# EAGLE board Logic_Level_Bidirectional-GiantPanel-v01 (EAGLE 6.5.0), part 1 of 13
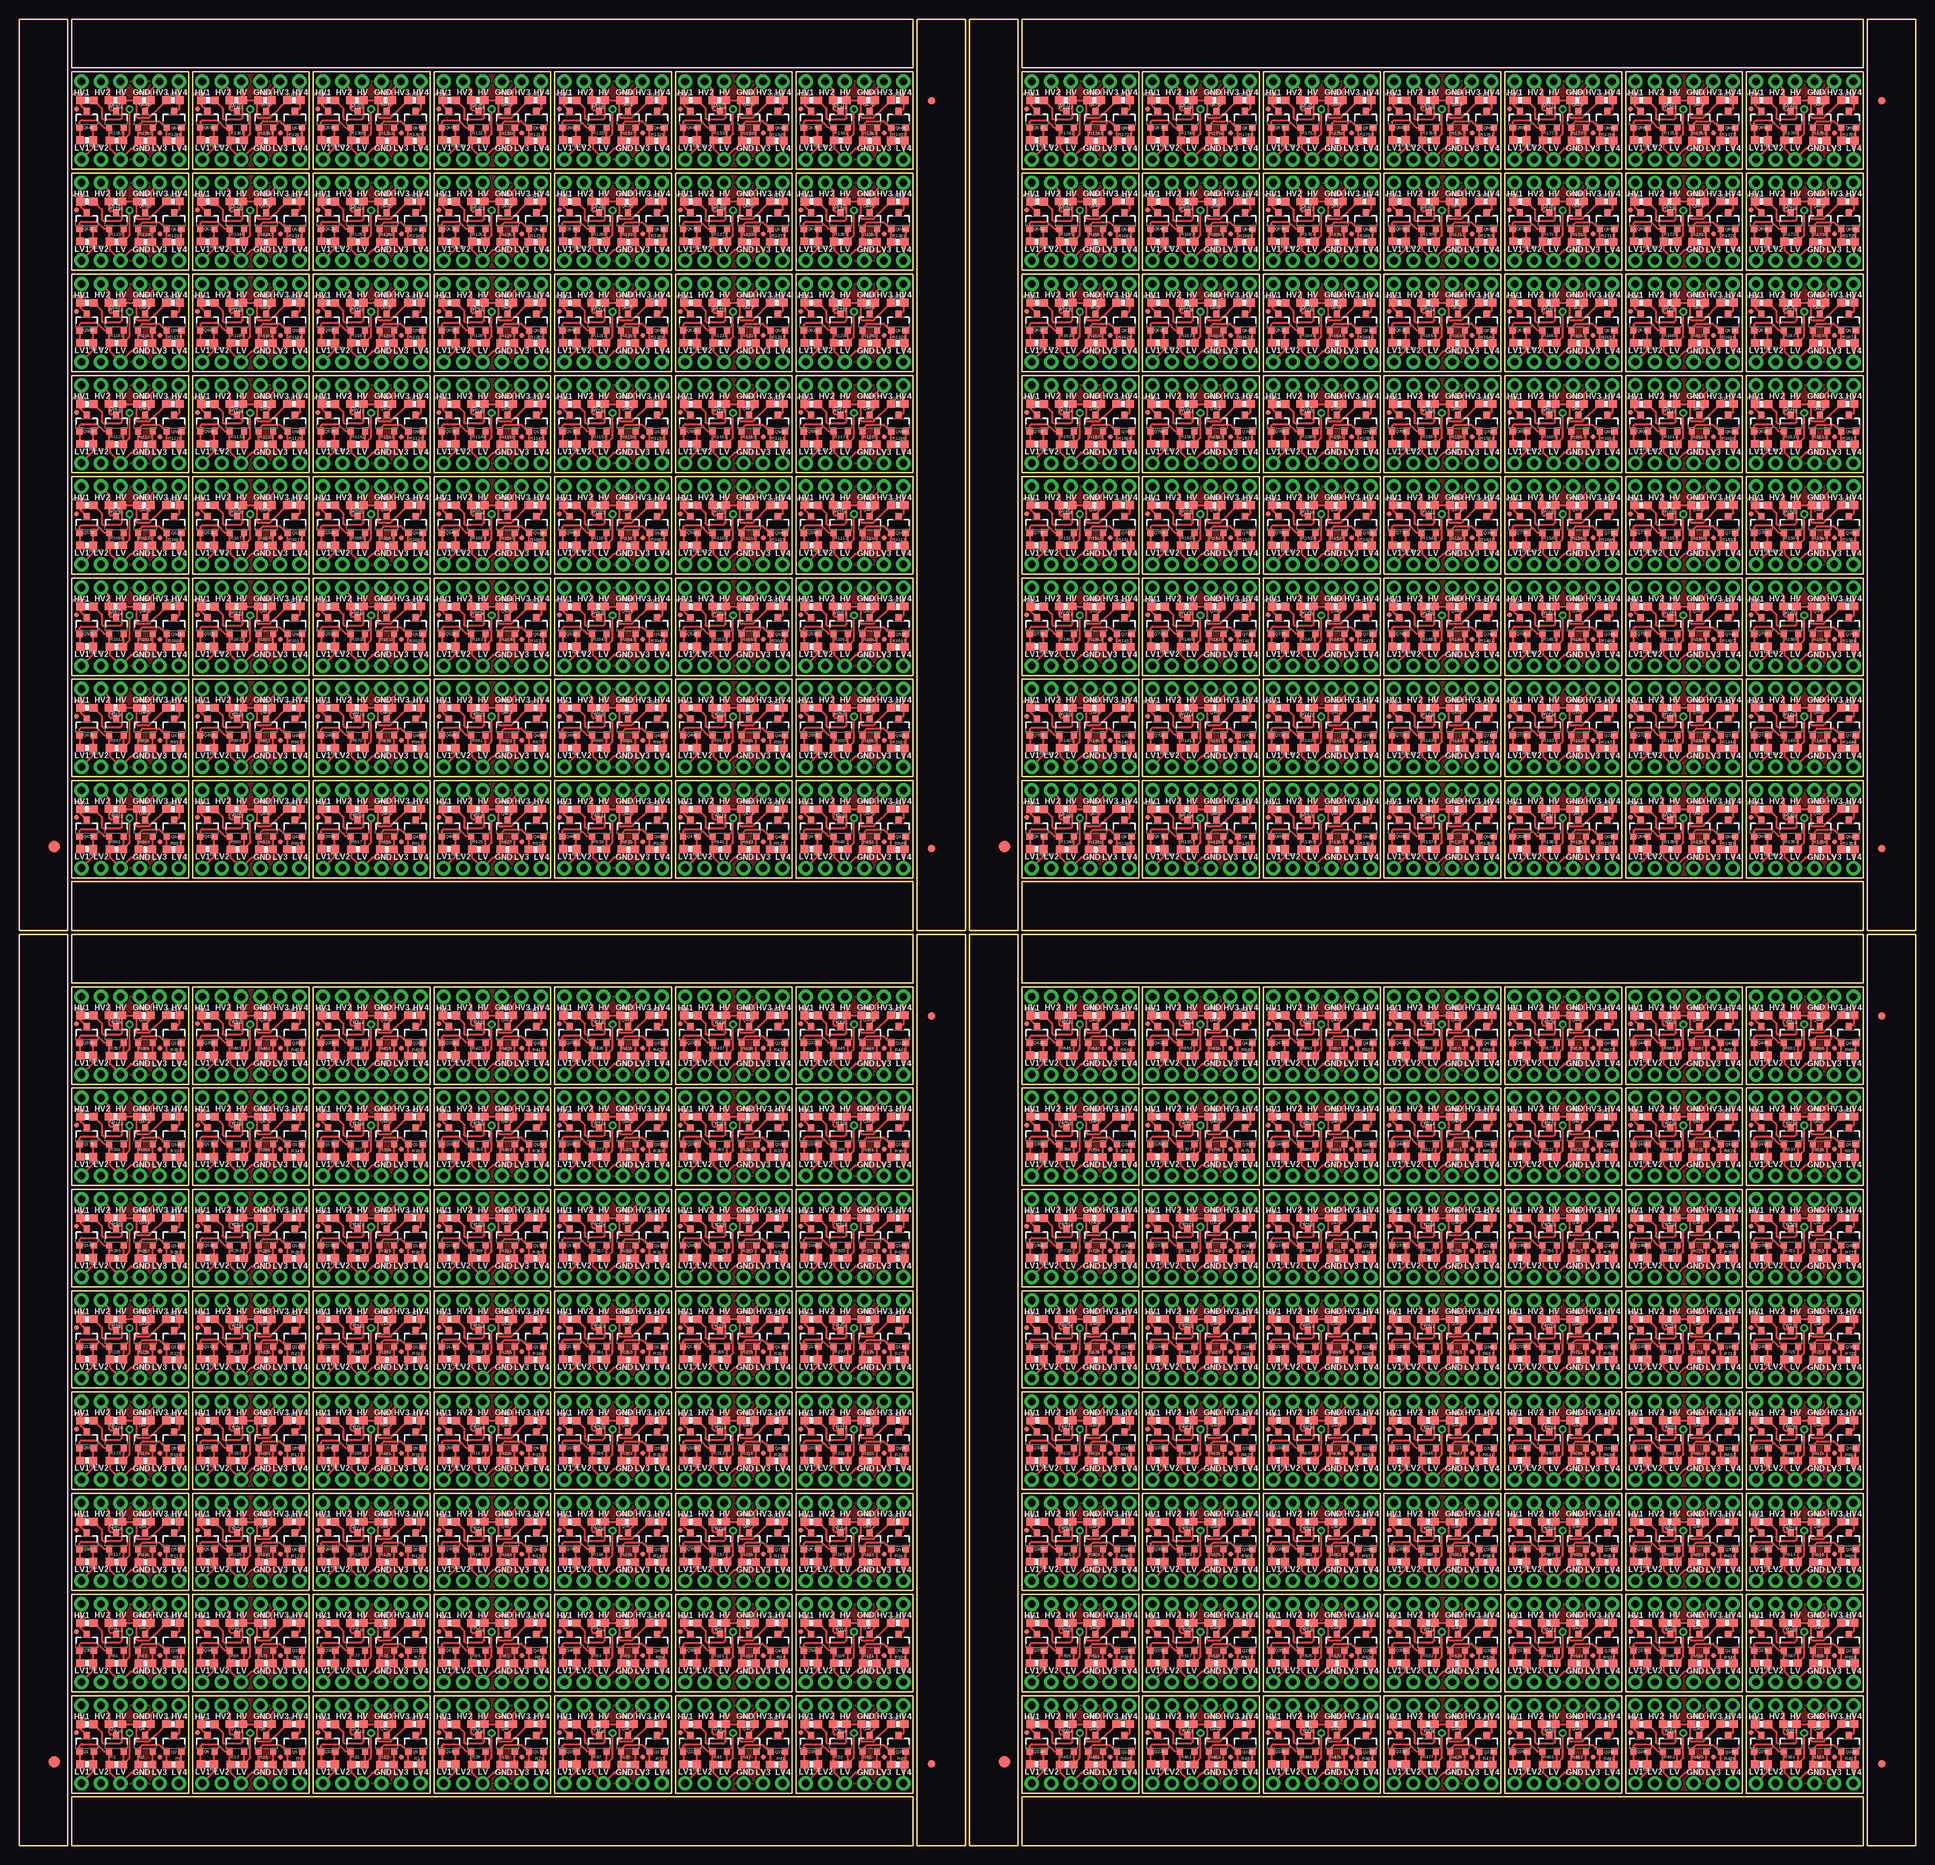
[diagram p0: board, top side]
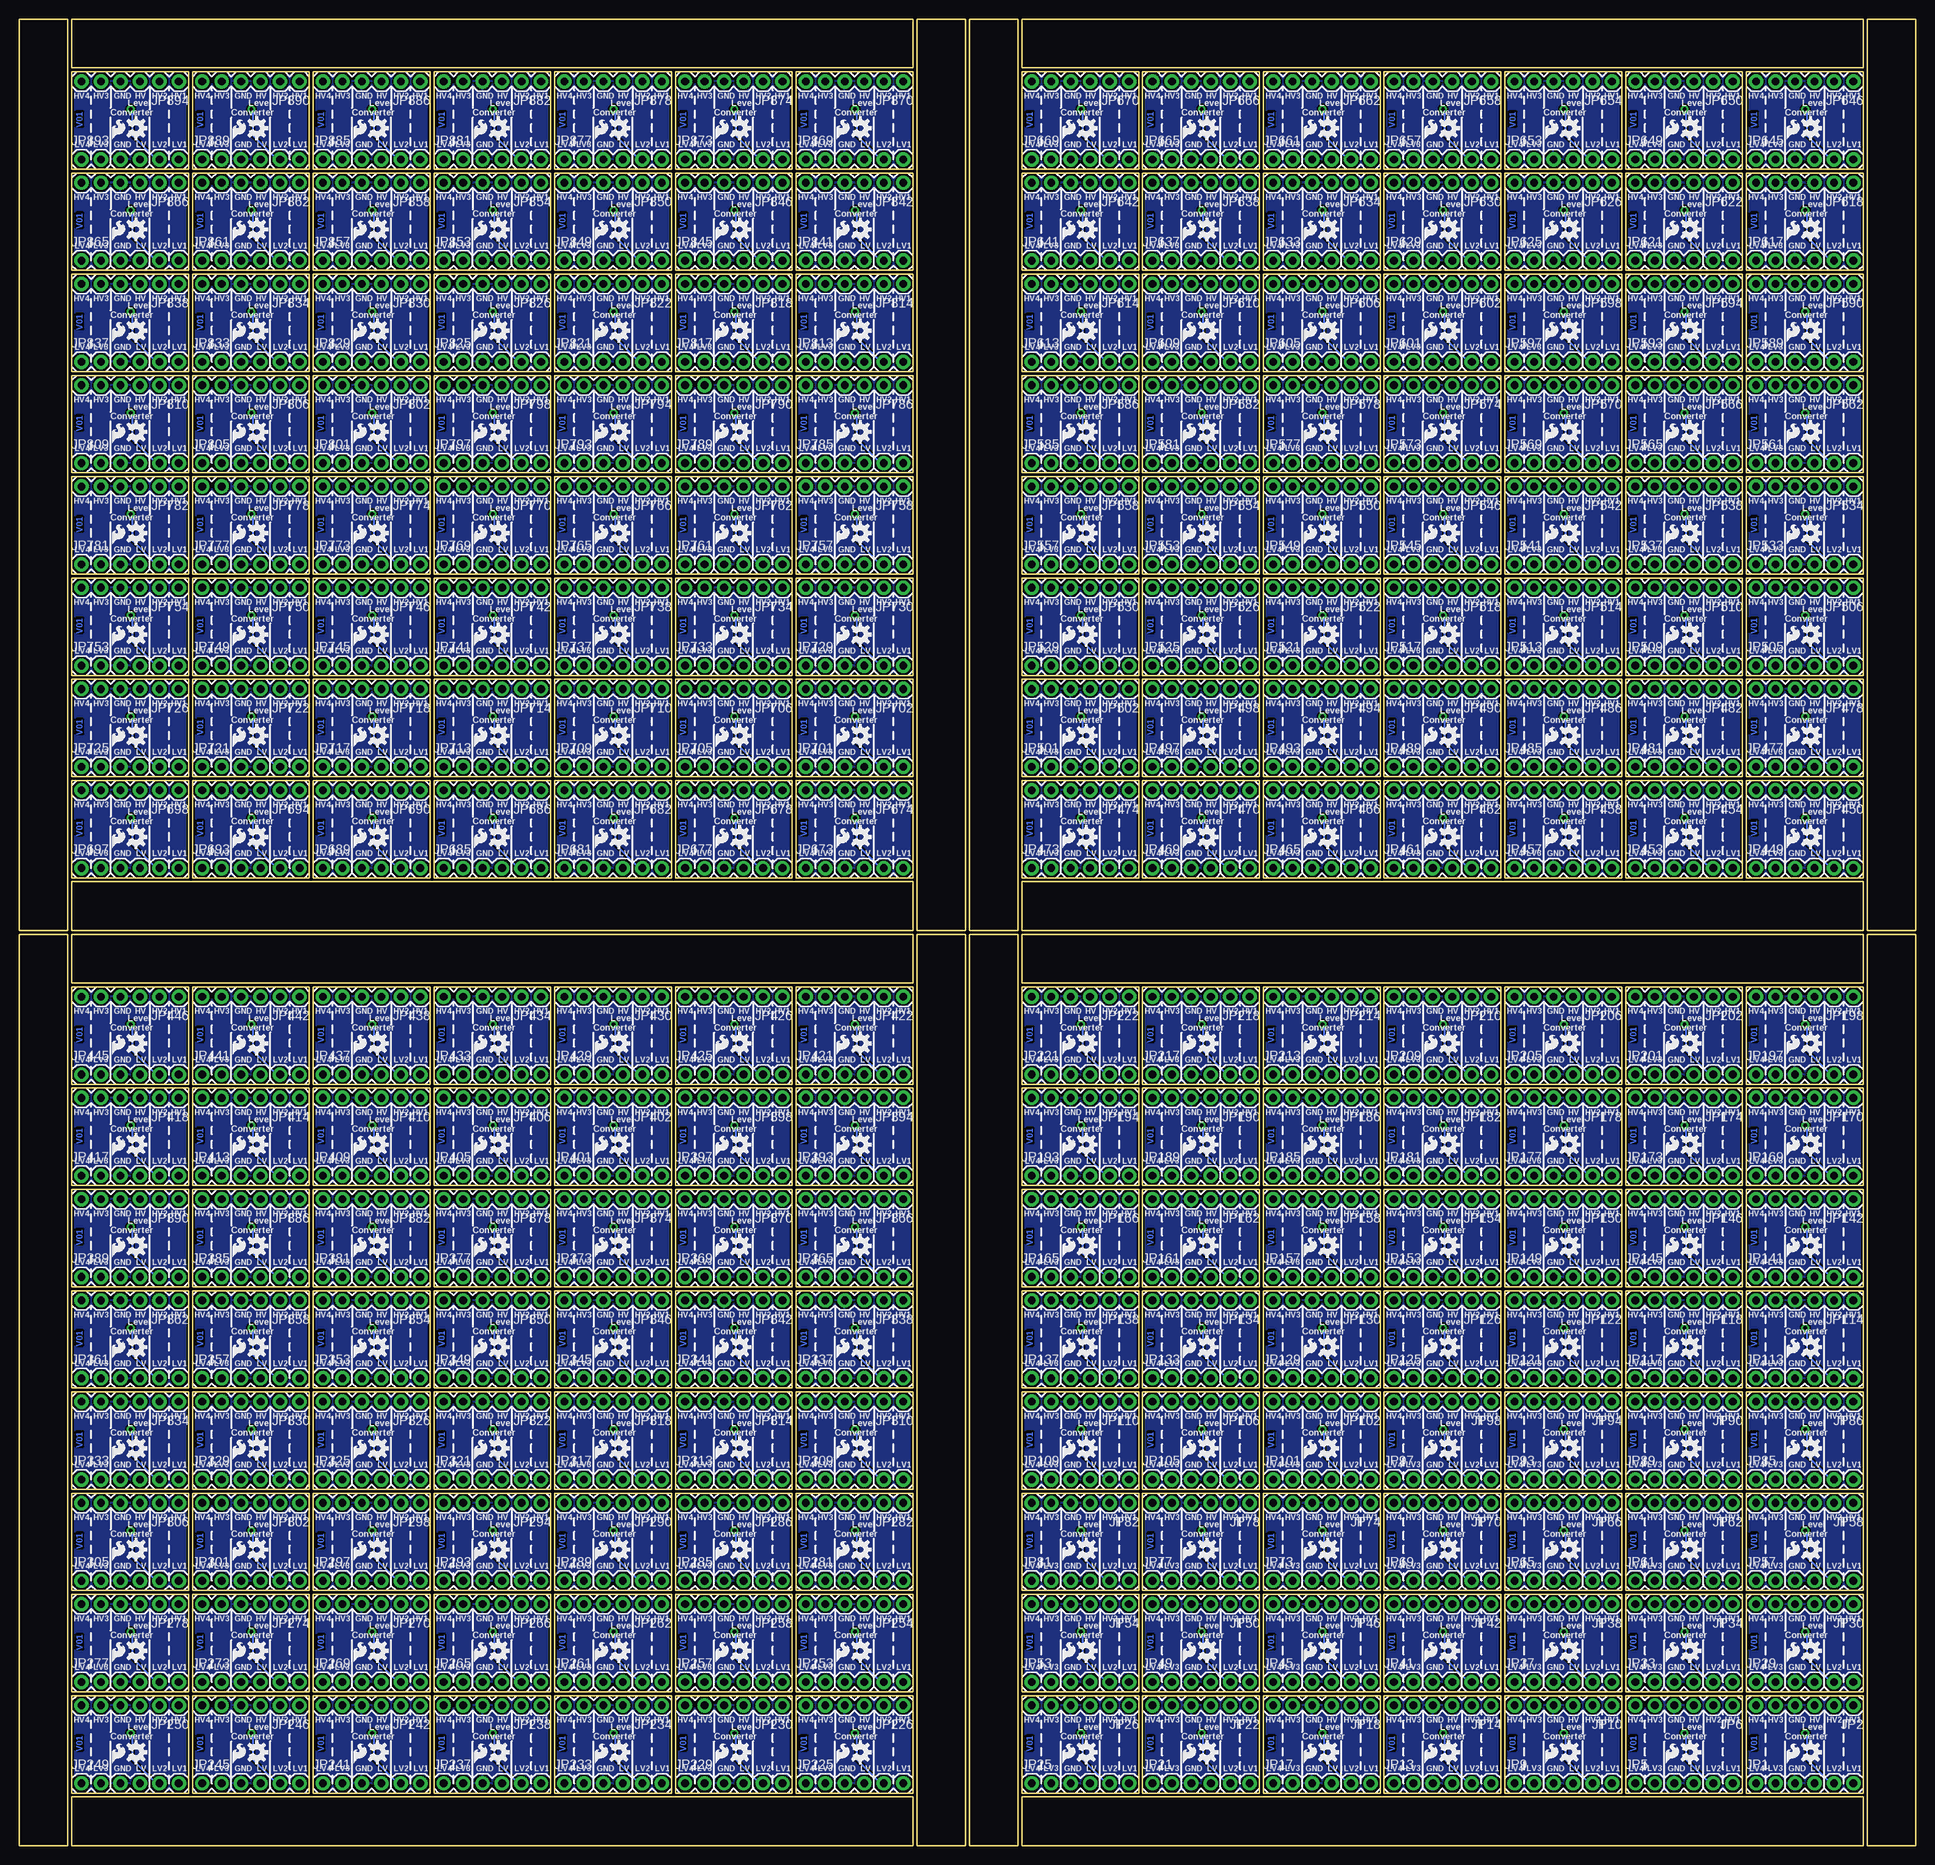
[diagram p1: board, bottom side, seen from below]

Size 247.4 x 238.25 mm. Coordinates in mm from the lower left corner, seen from the top.
Outline: 960 segments
Copper layers (1*16): Top 0.035mm / dielectric 1.5mm / Bottom 0.035mm
Design rules "SparkFun *": minimum track width 7mil, minimum drill 15mil, track to track 8mil, track to pad 8mil, pad to pad 8mil, via to via 8mil, smd to smd 8mil, copper to edge 8mil, drill to drill 8mil, minimum pad ring 12mil, minimum via ring 10mil, stop-mask expansion 4mil, vias tented up to drill 20mil, thermal gap 10mil

## Footprints (pad centres in the part's own frame; a part is rotated, then mirrored left to right if it is on the bottom)
FIDUCIAL-1.5X3 = smd 1.5 x 1.5: 1 0,0
FIDUCIAL-1X2 = smd 1 x 1: 1 0,0
1X06 = drill 1.016 pad 1.88: 1 0,0; 2 2.54,0; 3 5.08,0; 4 7.62,0; 5 10.16,0; 6 12.7,0
MICRO-FIDUCIAL = smd 0.635 x 0.635: 1 0,0
SOT23-3 = smd 0.8 x 0.9: 1 -0.95,-1; 2 0.95,-1; 3 0,1.1
0603-RES = smd 1.1 x 1: 1 -0.85,0; 2 0.85,0

## Placement (x,y rotation side)
E$1  [FIDUCIAL-1.5X3]  4.57,10.92 0 top
E$2  [FIDUCIAL-1X2]  242.95,10.67 0 top
E$3  [FIDUCIAL-1X2]  242.95,108.2 180 top
E$4  [FIDUCIAL-1X2]  119,10.67 0 top
E$5  [FIDUCIAL-1X2]  119,108.2 180 top
E$6  [FIDUCIAL-1.5X3]  128.52,10.92 0 top
E$7  [FIDUCIAL-1X2]  119,130.05 0 top
E$8  [FIDUCIAL-1X2]  119,227.58 180 top
E$9  [FIDUCIAL-1.5X3]  4.57,130.3 0 top
E$10  [FIDUCIAL-1X2]  242.95,130.05 0 top
E$11  [FIDUCIAL-1X2]  242.95,227.58 180 top
E$12  [FIDUCIAL-1.5X3]  128.52,130.3 0 top
JP1  [1X06]  20.83,8.13 0 bottom
JP2  [1X06]  8.13,18.29 180 bottom
JP3  FIDUCIALUFIDUCIAL  [MICRO-FIDUCIAL]  7.49,14.73 0 top
JP4  FIDUCIALUFIDUCIAL  [MICRO-FIDUCIAL]  18.34,11.58 0 top
JP5  [1X06]  36.58,8.13 0 bottom
JP6  [1X06]  23.88,18.29 180 bottom
JP7  FIDUCIALUFIDUCIAL  [MICRO-FIDUCIAL]  23.24,14.73 0 top
JP8  FIDUCIALUFIDUCIAL  [MICRO-FIDUCIAL]  34.09,11.58 0 top
JP9  [1X06]  52.32,8.13 0 bottom
JP10  [1X06]  39.62,18.29 180 bottom
JP11  FIDUCIALUFIDUCIAL  [MICRO-FIDUCIAL]  38.99,14.73 0 top
JP12  FIDUCIALUFIDUCIAL  [MICRO-FIDUCIAL]  49.83,11.58 0 top
JP13  [1X06]  68.07,8.13 0 bottom
JP14  [1X06]  55.37,18.29 180 bottom
JP15  FIDUCIALUFIDUCIAL  [MICRO-FIDUCIAL]  54.74,14.73 0 top
JP16  FIDUCIALUFIDUCIAL  [MICRO-FIDUCIAL]  65.58,11.58 0 top
JP17  [1X06]  83.82,8.13 0 bottom
JP18  [1X06]  71.12,18.29 180 bottom
JP19  FIDUCIALUFIDUCIAL  [MICRO-FIDUCIAL]  70.48,14.73 0 top
JP20  FIDUCIALUFIDUCIAL  [MICRO-FIDUCIAL]  81.33,11.58 0 top
JP21  [1X06]  99.57,8.13 0 bottom
JP22  [1X06]  86.87,18.29 180 bottom
JP23  FIDUCIALUFIDUCIAL  [MICRO-FIDUCIAL]  86.23,14.73 0 top
JP24  FIDUCIALUFIDUCIAL  [MICRO-FIDUCIAL]  97.08,11.58 0 top
JP25  [1X06]  115.32,8.13 0 bottom
JP26  [1X06]  102.62,18.29 180 bottom
JP27  FIDUCIALUFIDUCIAL  [MICRO-FIDUCIAL]  101.98,14.73 0 top
JP28  FIDUCIALUFIDUCIAL  [MICRO-FIDUCIAL]  112.83,11.58 0 top
JP29  [1X06]  20.83,21.34 0 bottom
JP30  [1X06]  8.13,31.5 180 bottom
JP31  FIDUCIALUFIDUCIAL  [MICRO-FIDUCIAL]  7.49,27.94 0 top
JP32  FIDUCIALUFIDUCIAL  [MICRO-FIDUCIAL]  18.34,24.79 0 top
JP33  [1X06]  36.58,21.34 0 bottom
JP34  [1X06]  23.88,31.5 180 bottom
JP35  FIDUCIALUFIDUCIAL  [MICRO-FIDUCIAL]  23.24,27.94 0 top
JP36  FIDUCIALUFIDUCIAL  [MICRO-FIDUCIAL]  34.09,24.79 0 top
JP37  [1X06]  52.32,21.34 0 bottom
JP38  [1X06]  39.62,31.5 180 bottom
JP39  FIDUCIALUFIDUCIAL  [MICRO-FIDUCIAL]  38.99,27.94 0 top
JP40  FIDUCIALUFIDUCIAL  [MICRO-FIDUCIAL]  49.83,24.79 0 top
JP41  [1X06]  68.07,21.34 0 bottom
JP42  [1X06]  55.37,31.5 180 bottom
JP43  FIDUCIALUFIDUCIAL  [MICRO-FIDUCIAL]  54.74,27.94 0 top
JP44  FIDUCIALUFIDUCIAL  [MICRO-FIDUCIAL]  65.58,24.79 0 top
JP45  [1X06]  83.82,21.34 0 bottom
JP46  [1X06]  71.12,31.5 180 bottom
JP47  FIDUCIALUFIDUCIAL  [MICRO-FIDUCIAL]  70.48,27.94 0 top
JP48  FIDUCIALUFIDUCIAL  [MICRO-FIDUCIAL]  81.33,24.79 0 top
JP49  [1X06]  99.57,21.34 0 bottom
JP50  [1X06]  86.87,31.5 180 bottom
JP51  FIDUCIALUFIDUCIAL  [MICRO-FIDUCIAL]  86.23,27.94 0 top
JP52  FIDUCIALUFIDUCIAL  [MICRO-FIDUCIAL]  97.08,24.79 0 top
JP53  [1X06]  115.32,21.34 0 bottom
JP54  [1X06]  102.62,31.5 180 bottom
JP55  FIDUCIALUFIDUCIAL  [MICRO-FIDUCIAL]  101.98,27.94 0 top
JP56  FIDUCIALUFIDUCIAL  [MICRO-FIDUCIAL]  112.83,24.79 0 top
JP57  [1X06]  20.83,34.54 0 bottom
JP58  [1X06]  8.13,44.7 180 bottom
JP59  FIDUCIALUFIDUCIAL  [MICRO-FIDUCIAL]  7.49,41.15 0 top
JP60  FIDUCIALUFIDUCIAL  [MICRO-FIDUCIAL]  18.34,38 0 top
JP61  [1X06]  36.58,34.54 0 bottom
JP62  [1X06]  23.88,44.7 180 bottom
JP63  FIDUCIALUFIDUCIAL  [MICRO-FIDUCIAL]  23.24,41.15 0 top
JP64  FIDUCIALUFIDUCIAL  [MICRO-FIDUCIAL]  34.09,38 0 top
JP65  [1X06]  52.32,34.54 0 bottom
JP66  [1X06]  39.62,44.7 180 bottom
JP67  FIDUCIALUFIDUCIAL  [MICRO-FIDUCIAL]  38.99,41.15 0 top
JP68  FIDUCIALUFIDUCIAL  [MICRO-FIDUCIAL]  49.83,38 0 top
JP69  [1X06]  68.07,34.54 0 bottom
JP70  [1X06]  55.37,44.7 180 bottom
JP71  FIDUCIALUFIDUCIAL  [MICRO-FIDUCIAL]  54.74,41.15 0 top
JP72  FIDUCIALUFIDUCIAL  [MICRO-FIDUCIAL]  65.58,38 0 top
JP73  [1X06]  83.82,34.54 0 bottom
JP74  [1X06]  71.12,44.7 180 bottom
JP75  FIDUCIALUFIDUCIAL  [MICRO-FIDUCIAL]  70.48,41.15 0 top
JP76  FIDUCIALUFIDUCIAL  [MICRO-FIDUCIAL]  81.33,38 0 top
JP77  [1X06]  99.57,34.54 0 bottom
JP78  [1X06]  86.87,44.7 180 bottom
JP79  FIDUCIALUFIDUCIAL  [MICRO-FIDUCIAL]  86.23,41.15 0 top
JP80  FIDUCIALUFIDUCIAL  [MICRO-FIDUCIAL]  97.08,38 0 top
JP81  [1X06]  115.32,34.54 0 bottom
JP82  [1X06]  102.62,44.7 180 bottom
JP83  FIDUCIALUFIDUCIAL  [MICRO-FIDUCIAL]  101.98,41.15 0 top
JP84  FIDUCIALUFIDUCIAL  [MICRO-FIDUCIAL]  112.83,38 0 top
JP85  [1X06]  20.83,47.75 0 bottom
JP86  [1X06]  8.13,57.91 180 bottom
JP87  FIDUCIALUFIDUCIAL  [MICRO-FIDUCIAL]  7.49,54.36 0 top
JP88  FIDUCIALUFIDUCIAL  [MICRO-FIDUCIAL]  18.34,51.21 0 top
JP89  [1X06]  36.58,47.75 0 bottom
JP90  [1X06]  23.88,57.91 180 bottom
JP91  FIDUCIALUFIDUCIAL  [MICRO-FIDUCIAL]  23.24,54.36 0 top
JP92  FIDUCIALUFIDUCIAL  [MICRO-FIDUCIAL]  34.09,51.21 0 top
JP93  [1X06]  52.32,47.75 0 bottom
JP94  [1X06]  39.62,57.91 180 bottom
JP95  FIDUCIALUFIDUCIAL  [MICRO-FIDUCIAL]  38.99,54.36 0 top
JP96  FIDUCIALUFIDUCIAL  [MICRO-FIDUCIAL]  49.83,51.21 0 top
JP97  [1X06]  68.07,47.75 0 bottom
JP98  [1X06]  55.37,57.91 180 bottom
JP99  FIDUCIALUFIDUCIAL  [MICRO-FIDUCIAL]  54.74,54.36 0 top
JP100  FIDUCIALUFIDUCIAL  [MICRO-FIDUCIAL]  65.58,51.21 0 top
JP101  [1X06]  83.82,47.75 0 bottom
JP102  [1X06]  71.12,57.91 180 bottom
JP103  FIDUCIALUFIDUCIAL  [MICRO-FIDUCIAL]  70.48,54.36 0 top
JP104  FIDUCIALUFIDUCIAL  [MICRO-FIDUCIAL]  81.33,51.21 0 top
JP105  [1X06]  99.57,47.75 0 bottom
JP106  [1X06]  86.87,57.91 180 bottom
JP107  FIDUCIALUFIDUCIAL  [MICRO-FIDUCIAL]  86.23,54.36 0 top
JP108  FIDUCIALUFIDUCIAL  [MICRO-FIDUCIAL]  97.08,51.21 0 top
JP109  [1X06]  115.32,47.75 0 bottom
JP110  [1X06]  102.62,57.91 180 bottom
JP111  FIDUCIALUFIDUCIAL  [MICRO-FIDUCIAL]  101.98,54.36 0 top
JP112  FIDUCIALUFIDUCIAL  [MICRO-FIDUCIAL]  112.83,51.21 0 top
JP113  [1X06]  20.83,60.96 0 bottom
JP114  [1X06]  8.13,71.12 180 bottom
JP115  FIDUCIALUFIDUCIAL  [MICRO-FIDUCIAL]  7.49,67.56 0 top
JP116  FIDUCIALUFIDUCIAL  [MICRO-FIDUCIAL]  18.34,64.41 0 top
JP117  [1X06]  36.58,60.96 0 bottom
JP118  [1X06]  23.88,71.12 180 bottom
JP119  FIDUCIALUFIDUCIAL  [MICRO-FIDUCIAL]  23.24,67.56 0 top
JP120  FIDUCIALUFIDUCIAL  [MICRO-FIDUCIAL]  34.09,64.41 0 top
JP121  [1X06]  52.32,60.96 0 bottom
JP122  [1X06]  39.62,71.12 180 bottom
JP123  FIDUCIALUFIDUCIAL  [MICRO-FIDUCIAL]  38.99,67.56 0 top
JP124  FIDUCIALUFIDUCIAL  [MICRO-FIDUCIAL]  49.83,64.41 0 top
JP125  [1X06]  68.07,60.96 0 bottom
JP126  [1X06]  55.37,71.12 180 bottom
JP127  FIDUCIALUFIDUCIAL  [MICRO-FIDUCIAL]  54.74,67.56 0 top
JP128  FIDUCIALUFIDUCIAL  [MICRO-FIDUCIAL]  65.58,64.41 0 top
JP129  [1X06]  83.82,60.96 0 bottom
JP130  [1X06]  71.12,71.12 180 bottom
JP131  FIDUCIALUFIDUCIAL  [MICRO-FIDUCIAL]  70.48,67.56 0 top
JP132  FIDUCIALUFIDUCIAL  [MICRO-FIDUCIAL]  81.33,64.41 0 top
JP133  [1X06]  99.57,60.96 0 bottom
JP134  [1X06]  86.87,71.12 180 bottom
JP135  FIDUCIALUFIDUCIAL  [MICRO-FIDUCIAL]  86.23,67.56 0 top
JP136  FIDUCIALUFIDUCIAL  [MICRO-FIDUCIAL]  97.08,64.41 0 top
JP137  [1X06]  115.32,60.96 0 bottom
JP138  [1X06]  102.62,71.12 180 bottom
JP139  FIDUCIALUFIDUCIAL  [MICRO-FIDUCIAL]  101.98,67.56 0 top
JP140  FIDUCIALUFIDUCIAL  [MICRO-FIDUCIAL]  112.83,64.41 0 top
JP141  [1X06]  20.83,74.17 0 bottom
JP142  [1X06]  8.13,84.33 180 bottom
JP143  FIDUCIALUFIDUCIAL  [MICRO-FIDUCIAL]  7.49,80.77 0 top
JP144  FIDUCIALUFIDUCIAL  [MICRO-FIDUCIAL]  18.34,77.62 0 top
JP145  [1X06]  36.58,74.17 0 bottom
JP146  [1X06]  23.88,84.33 180 bottom
JP147  FIDUCIALUFIDUCIAL  [MICRO-FIDUCIAL]  23.24,80.77 0 top
JP148  FIDUCIALUFIDUCIAL  [MICRO-FIDUCIAL]  34.09,77.62 0 top
JP149  [1X06]  52.32,74.17 0 bottom
JP150  [1X06]  39.62,84.33 180 bottom
JP151  FIDUCIALUFIDUCIAL  [MICRO-FIDUCIAL]  38.99,80.77 0 top
JP152  FIDUCIALUFIDUCIAL  [MICRO-FIDUCIAL]  49.83,77.62 0 top
JP153  [1X06]  68.07,74.17 0 bottom
JP154  [1X06]  55.37,84.33 180 bottom
JP155  FIDUCIALUFIDUCIAL  [MICRO-FIDUCIAL]  54.74,80.77 0 top
JP156  FIDUCIALUFIDUCIAL  [MICRO-FIDUCIAL]  65.58,77.62 0 top
JP157  [1X06]  83.82,74.17 0 bottom
JP158  [1X06]  71.12,84.33 180 bottom
JP159  FIDUCIALUFIDUCIAL  [MICRO-FIDUCIAL]  70.48,80.77 0 top
JP160  FIDUCIALUFIDUCIAL  [MICRO-FIDUCIAL]  81.33,77.62 0 top
JP161  [1X06]  99.57,74.17 0 bottom
JP162  [1X06]  86.87,84.33 180 bottom
JP163  FIDUCIALUFIDUCIAL  [MICRO-FIDUCIAL]  86.23,80.77 0 top
JP164  FIDUCIALUFIDUCIAL  [MICRO-FIDUCIAL]  97.08,77.62 0 top
JP165  [1X06]  115.32,74.17 0 bottom
JP166  [1X06]  102.62,84.33 180 bottom
JP167  FIDUCIALUFIDUCIAL  [MICRO-FIDUCIAL]  101.98,80.77 0 top
JP168  FIDUCIALUFIDUCIAL  [MICRO-FIDUCIAL]  112.83,77.62 0 top
JP169  [1X06]  20.83,87.38 0 bottom
JP170  [1X06]  8.13,97.54 180 bottom
JP171  FIDUCIALUFIDUCIAL  [MICRO-FIDUCIAL]  7.49,93.98 0 top
JP172  FIDUCIALUFIDUCIAL  [MICRO-FIDUCIAL]  18.34,90.83 0 top
JP173  [1X06]  36.58,87.38 0 bottom
JP174  [1X06]  23.88,97.54 180 bottom
JP175  FIDUCIALUFIDUCIAL  [MICRO-FIDUCIAL]  23.24,93.98 0 top
JP176  FIDUCIALUFIDUCIAL  [MICRO-FIDUCIAL]  34.09,90.83 0 top
JP177  [1X06]  52.32,87.38 0 bottom
JP178  [1X06]  39.62,97.54 180 bottom
JP179  FIDUCIALUFIDUCIAL  [MICRO-FIDUCIAL]  38.99,93.98 0 top
JP180  FIDUCIALUFIDUCIAL  [MICRO-FIDUCIAL]  49.83,90.83 0 top
JP181  [1X06]  68.07,87.38 0 bottom
JP182  [1X06]  55.37,97.54 180 bottom
JP183  FIDUCIALUFIDUCIAL  [MICRO-FIDUCIAL]  54.74,93.98 0 top
JP184  FIDUCIALUFIDUCIAL  [MICRO-FIDUCIAL]  65.58,90.83 0 top
JP185  [1X06]  83.82,87.38 0 bottom
JP186  [1X06]  71.12,97.54 180 bottom
JP187  FIDUCIALUFIDUCIAL  [MICRO-FIDUCIAL]  70.48,93.98 0 top
JP188  FIDUCIALUFIDUCIAL  [MICRO-FIDUCIAL]  81.33,90.83 0 top
JP189  [1X06]  99.57,87.38 0 bottom
JP190  [1X06]  86.87,97.54 180 bottom
JP191  FIDUCIALUFIDUCIAL  [MICRO-FIDUCIAL]  86.23,93.98 0 top
JP192  FIDUCIALUFIDUCIAL  [MICRO-FIDUCIAL]  97.08,90.83 0 top
JP193  [1X06]  115.32,87.38 0 bottom
JP194  [1X06]  102.62,97.54 180 bottom
JP195  FIDUCIALUFIDUCIAL  [MICRO-FIDUCIAL]  101.98,93.98 0 top
JP196  FIDUCIALUFIDUCIAL  [MICRO-FIDUCIAL]  112.83,90.83 0 top
JP197  [1X06]  20.83,100.58 0 bottom
JP198  [1X06]  8.13,110.74 180 bottom
JP199  FIDUCIALUFIDUCIAL  [MICRO-FIDUCIAL]  7.49,107.19 0 top
JP200  FIDUCIALUFIDUCIAL  [MICRO-FIDUCIAL]  18.34,104.04 0 top
JP201  [1X06]  36.58,100.58 0 bottom
JP202  [1X06]  23.88,110.74 180 bottom
JP203  FIDUCIALUFIDUCIAL  [MICRO-FIDUCIAL]  23.24,107.19 0 top
JP204  FIDUCIALUFIDUCIAL  [MICRO-FIDUCIAL]  34.09,104.04 0 top
JP205  [1X06]  52.32,100.58 0 bottom
JP206  [1X06]  39.62,110.74 180 bottom
JP207  FIDUCIALUFIDUCIAL  [MICRO-FIDUCIAL]  38.99,107.19 0 top
JP208  FIDUCIALUFIDUCIAL  [MICRO-FIDUCIAL]  49.83,104.04 0 top
JP209  [1X06]  68.07,100.58 0 bottom
JP210  [1X06]  55.37,110.74 180 bottom
JP211  FIDUCIALUFIDUCIAL  [MICRO-FIDUCIAL]  54.74,107.19 0 top
JP212  FIDUCIALUFIDUCIAL  [MICRO-FIDUCIAL]  65.58,104.04 0 top
JP213  [1X06]  83.82,100.58 0 bottom
JP214  [1X06]  71.12,110.74 180 bottom
JP215  FIDUCIALUFIDUCIAL  [MICRO-FIDUCIAL]  70.48,107.19 0 top
JP216  FIDUCIALUFIDUCIAL  [MICRO-FIDUCIAL]  81.33,104.04 0 top
JP217  [1X06]  99.57,100.58 0 bottom
JP218  [1X06]  86.87,110.74 180 bottom
JP219  FIDUCIALUFIDUCIAL  [MICRO-FIDUCIAL]  86.23,107.19 0 top
JP220  FIDUCIALUFIDUCIAL  [MICRO-FIDUCIAL]  97.08,104.04 0 top
JP221  [1X06]  115.32,100.58 0 bottom
JP222  [1X06]  102.62,110.74 180 bottom
JP223  FIDUCIALUFIDUCIAL  [MICRO-FIDUCIAL]  101.98,107.19 0 top
JP224  FIDUCIALUFIDUCIAL  [MICRO-FIDUCIAL]  112.83,104.04 0 top
JP225  [1X06]  144.78,8.13 0 bottom
JP226  [1X06]  132.08,18.29 180 bottom
JP227  FIDUCIALUFIDUCIAL  [MICRO-FIDUCIAL]  131.44,14.73 0 top
JP228  FIDUCIALUFIDUCIAL  [MICRO-FIDUCIAL]  142.29,11.58 0 top
JP229  [1X06]  160.53,8.13 0 bottom
JP230  [1X06]  147.83,18.29 180 bottom
JP231  FIDUCIALUFIDUCIAL  [MICRO-FIDUCIAL]  147.19,14.73 0 top
JP232  FIDUCIALUFIDUCIAL  [MICRO-FIDUCIAL]  158.04,11.58 0 top
JP233  [1X06]  176.28,8.13 0 bottom
JP234  [1X06]  163.58,18.29 180 bottom
JP235  FIDUCIALUFIDUCIAL  [MICRO-FIDUCIAL]  162.94,14.73 0 top
JP236  FIDUCIALUFIDUCIAL  [MICRO-FIDUCIAL]  173.79,11.58 0 top
JP237  [1X06]  192.02,8.13 0 bottom
JP238  [1X06]  179.32,18.29 180 bottom
JP239  FIDUCIALUFIDUCIAL  [MICRO-FIDUCIAL]  178.69,14.73 0 top
JP240  FIDUCIALUFIDUCIAL  [MICRO-FIDUCIAL]  189.53,11.58 0 top
JP241  [1X06]  207.77,8.13 0 bottom
JP242  [1X06]  195.07,18.29 180 bottom
JP243  FIDUCIALUFIDUCIAL  [MICRO-FIDUCIAL]  194.44,14.73 0 top
JP244  FIDUCIALUFIDUCIAL  [MICRO-FIDUCIAL]  205.28,11.58 0 top
JP245  [1X06]  223.52,8.13 0 bottom
JP246  [1X06]  210.82,18.29 180 bottom
JP247  FIDUCIALUFIDUCIAL  [MICRO-FIDUCIAL]  210.19,14.73 0 top
JP248  FIDUCIALUFIDUCIAL  [MICRO-FIDUCIAL]  221.03,11.58 0 top
JP249  [1X06]  239.27,8.13 0 bottom
JP250  [1X06]  226.57,18.29 180 bottom
JP251  FIDUCIALUFIDUCIAL  [MICRO-FIDUCIAL]  225.93,14.73 0 top
JP252  FIDUCIALUFIDUCIAL  [MICRO-FIDUCIAL]  236.78,11.58 0 top
JP253  [1X06]  144.78,21.34 0 bottom
JP254  [1X06]  132.08,31.5 180 bottom
JP255  FIDUCIALUFIDUCIAL  [MICRO-FIDUCIAL]  131.44,27.94 0 top
JP256  FIDUCIALUFIDUCIAL  [MICRO-FIDUCIAL]  142.29,24.79 0 top
JP257  [1X06]  160.53,21.34 0 bottom
JP258  [1X06]  147.83,31.5 180 bottom
JP259  FIDUCIALUFIDUCIAL  [MICRO-FIDUCIAL]  147.19,27.94 0 top
JP260  FIDUCIALUFIDUCIAL  [MICRO-FIDUCIAL]  158.04,24.79 0 top
JP261  [1X06]  176.28,21.34 0 bottom
JP262  [1X06]  163.58,31.5 180 bottom
JP263  FIDUCIALUFIDUCIAL  [MICRO-FIDUCIAL]  162.94,27.94 0 top
JP264  FIDUCIALUFIDUCIAL  [MICRO-FIDUCIAL]  173.79,24.79 0 top
JP265  [1X06]  192.02,21.34 0 bottom
JP266  [1X06]  179.32,31.5 180 bottom
JP267  FIDUCIALUFIDUCIAL  [MICRO-FIDUCIAL]  178.69,27.94 0 top
JP268  FIDUCIALUFIDUCIAL  [MICRO-FIDUCIAL]  189.53,24.79 0 top
JP269  [1X06]  207.77,21.34 0 bottom
JP270  [1X06]  195.07,31.5 180 bottom
JP271  FIDUCIALUFIDUCIAL  [MICRO-FIDUCIAL]  194.44,27.94 0 top
JP272  FIDUCIALUFIDUCIAL  [MICRO-FIDUCIAL]  205.28,24.79 0 top
JP273  [1X06]  223.52,21.34 0 bottom
JP274  [1X06]  210.82,31.5 180 bottom
JP275  FIDUCIALUFIDUCIAL  [MICRO-FIDUCIAL]  210.19,27.94 0 top
JP276  FIDUCIALUFIDUCIAL  [MICRO-FIDUCIAL]  221.03,24.79 0 top
JP277  [1X06]  239.27,21.34 0 bottom
JP278  [1X06]  226.57,31.5 180 bottom
JP279  FIDUCIALUFIDUCIAL  [MICRO-FIDUCIAL]  225.93,27.94 0 top
JP280  FIDUCIALUFIDUCIAL  [MICRO-FIDUCIAL]  236.78,24.79 0 top
JP281  [1X06]  144.78,34.54 0 bottom
JP282  [1X06]  132.08,44.7 180 bottom
JP283  FIDUCIALUFIDUCIAL  [MICRO-FIDUCIAL]  131.44,41.15 0 top
JP284  FIDUCIALUFIDUCIAL  [MICRO-FIDUCIAL]  142.29,38 0 top
JP285  [1X06]  160.53,34.54 0 bottom
JP286  [1X06]  147.83,44.7 180 bottom
JP287  FIDUCIALUFIDUCIAL  [MICRO-FIDUCIAL]  147.19,41.15 0 top
JP288  FIDUCIALUFIDUCIAL  [MICRO-FIDUCIAL]  158.04,38 0 top
JP289  [1X06]  176.28,34.54 0 bottom
JP290  [1X06]  163.58,44.7 180 bottom
JP291  FIDUCIALUFIDUCIAL  [MICRO-FIDUCIAL]  162.94,41.15 0 top
JP292  FIDUCIALUFIDUCIAL  [MICRO-FIDUCIAL]  173.79,38 0 top
JP293  [1X06]  192.02,34.54 0 bottom
JP294  [1X06]  179.32,44.7 180 bottom
JP295  FIDUCIALUFIDUCIAL  [MICRO-FIDUCIAL]  178.69,41.15 0 top
JP296  FIDUCIALUFIDUCIAL  [MICRO-FIDUCIAL]  189.53,38 0 top
JP297  [1X06]  207.77,34.54 0 bottom
JP298  [1X06]  195.07,44.7 180 bottom
JP299  FIDUCIALUFIDUCIAL  [MICRO-FIDUCIAL]  194.44,41.15 0 top
JP300  FIDUCIALUFIDUCIAL  [MICRO-FIDUCIAL]  205.28,38 0 top
JP301  [1X06]  223.52,34.54 0 bottom
JP302  [1X06]  210.82,44.7 180 bottom
JP303  FIDUCIALUFIDUCIAL  [MICRO-FIDUCIAL]  210.19,41.15 0 top
JP304  FIDUCIALUFIDUCIAL  [MICRO-FIDUCIAL]  221.03,38 0 top
JP305  [1X06]  239.27,34.54 0 bottom
JP306  [1X06]  226.57,44.7 180 bottom
JP307  FIDUCIALUFIDUCIAL  [MICRO-FIDUCIAL]  225.93,41.15 0 top
JP308  FIDUCIALUFIDUCIAL  [MICRO-FIDUCIAL]  236.78,38 0 top
JP309  [1X06]  144.78,47.75 0 bottom
JP310  [1X06]  132.08,57.91 180 bottom
JP311  FIDUCIALUFIDUCIAL  [MICRO-FIDUCIAL]  131.44,54.36 0 top
JP312  FIDUCIALUFIDUCIAL  [MICRO-FIDUCIAL]  142.29,51.21 0 top
JP313  [1X06]  160.53,47.75 0 bottom
JP314  [1X06]  147.83,57.91 180 bottom
JP315  FIDUCIALUFIDUCIAL  [MICRO-FIDUCIAL]  147.19,54.36 0 top
JP316  FIDUCIALUFIDUCIAL  [MICRO-FIDUCIAL]  158.04,51.21 0 top
JP317  [1X06]  176.28,47.75 0 bottom
JP318  [1X06]  163.58,57.91 180 bottom
JP319  FIDUCIALUFIDUCIAL  [MICRO-FIDUCIAL]  162.94,54.36 0 top
JP320  FIDUCIALUFIDUCIAL  [MICRO-FIDUCIAL]  173.79,51.21 0 top
JP321  [1X06]  192.02,47.75 0 bottom
JP322  [1X06]  179.32,57.91 180 bottom
JP323  FIDUCIALUFIDUCIAL  [MICRO-FIDUCIAL]  178.69,54.36 0 top
JP324  FIDUCIALUFIDUCIAL  [MICRO-FIDUCIAL]  189.53,51.21 0 top
JP325  [1X06]  207.77,47.75 0 bottom
JP326  [1X06]  195.07,57.91 180 bottom
JP327  FIDUCIALUFIDUCIAL  [MICRO-FIDUCIAL]  194.44,54.36 0 top
JP328  FIDUCIALUFIDUCIAL  [MICRO-FIDUCIAL]  205.28,51.21 0 top
JP329  [1X06]  223.52,47.75 0 bottom
JP330  [1X06]  210.82,57.91 180 bottom
JP331  FIDUCIALUFIDUCIAL  [MICRO-FIDUCIAL]  210.19,54.36 0 top
JP332  FIDUCIALUFIDUCIAL  [MICRO-FIDUCIAL]  221.03,51.21 0 top
JP333  [1X06]  239.27,47.75 0 bottom
JP334  [1X06]  226.57,57.91 180 bottom
JP335  FIDUCIALUFIDUCIAL  [MICRO-FIDUCIAL]  225.93,54.36 0 top
JP336  FIDUCIALUFIDUCIAL  [MICRO-FIDUCIAL]  236.78,51.21 0 top
JP337  [1X06]  144.78,60.96 0 bottom
JP338  [1X06]  132.08,71.12 180 bottom
JP339  FIDUCIALUFIDUCIAL  [MICRO-FIDUCIAL]  131.44,67.56 0 top
JP340  FIDUCIALUFIDUCIAL  [MICRO-FIDUCIAL]  142.29,64.41 0 top
JP341  [1X06]  160.53,60.96 0 bottom
JP342  [1X06]  147.83,71.12 180 bottom
JP343  FIDUCIALUFIDUCIAL  [MICRO-FIDUCIAL]  147.19,67.56 0 top
JP344  FIDUCIALUFIDUCIAL  [MICRO-FIDUCIAL]  158.04,64.41 0 top
JP345  [1X06]  176.28,60.96 0 bottom
JP346  [1X06]  163.58,71.12 180 bottom
JP347  FIDUCIALUFIDUCIAL  [MICRO-FIDUCIAL]  162.94,67.56 0 top
JP348  FIDUCIALUFIDUCIAL  [MICRO-FIDUCIAL]  173.79,64.41 0 top
JP349  [1X06]  192.02,60.96 0 bottom
JP350  [1X06]  179.32,71.12 180 bottom
JP351  FIDUCIALUFIDUCIAL  [MICRO-FIDUCIAL]  178.69,67.56 0 top
JP352  FIDUCIALUFIDUCIAL  [MICRO-FIDUCIAL]  189.53,64.41 0 top
JP353  [1X06]  207.77,60.96 0 bottom
JP354  [1X06]  195.07,71.12 180 bottom
JP355  FIDUCIALUFIDUCIAL  [MICRO-FIDUCIAL]  194.44,67.56 0 top
JP356  FIDUCIALUFIDUCIAL  [MICRO-FIDUCIAL]  205.28,64.41 0 top
JP357  [1X06]  223.52,60.96 0 bottom
JP358  [1X06]  210.82,71.12 180 bottom
JP359  FIDUCIALUFIDUCIAL  [MICRO-FIDUCIAL]  210.19,67.56 0 top
JP360  FIDUCIALUFIDUCIAL  [MICRO-FIDUCIAL]  221.03,64.41 0 top
JP361  [1X06]  239.27,60.96 0 bottom
JP362  [1X06]  226.57,71.12 180 bottom
JP363  FIDUCIALUFIDUCIAL  [MICRO-FIDUCIAL]  225.93,67.56 0 top
JP364  FIDUCIALUFIDUCIAL  [MICRO-FIDUCIAL]  236.78,64.41 0 top
JP365  [1X06]  144.78,74.17 0 bottom
JP366  [1X06]  132.08,84.33 180 bottom
JP367  FIDUCIALUFIDUCIAL  [MICRO-FIDUCIAL]  131.44,80.77 0 top
JP368  FIDUCIALUFIDUCIAL  [MICRO-FIDUCIAL]  142.29,77.62 0 top
JP369  [1X06]  160.53,74.17 0 bottom
JP370  [1X06]  147.83,84.33 180 bottom
JP371  FIDUCIALUFIDUCIAL  [MICRO-FIDUCIAL]  147.19,80.77 0 top
JP372  FIDUCIALUFIDUCIAL  [MICRO-FIDUCIAL]  158.04,77.62 0 top
JP373  [1X06]  176.28,74.17 0 bottom
JP374  [1X06]  163.58,84.33 180 bottom
JP375  FIDUCIALUFIDUCIAL  [MICRO-FIDUCIAL]  162.94,80.77 0 top
JP376  FIDUCIALUFIDUCIAL  [MICRO-FIDUCIAL]  173.79,77.62 0 top
JP377  [1X06]  192.02,74.17 0 bottom
JP378  [1X06]  179.32,84.33 180 bottom
JP379  FIDUCIALUFIDUCIAL  [MICRO-FIDUCIAL]  178.69,80.77 0 top
JP380  FIDUCIALUFIDUCIAL  [MICRO-FIDUCIAL]  189.53,77.62 0 top
JP381  [1X06]  207.77,74.17 0 bottom
JP382  [1X06]  195.07,84.33 180 bottom
JP383  FIDUCIALUFIDUCIAL  [MICRO-FIDUCIAL]  194.44,80.77 0 top
JP384  FIDUCIALUFIDUCIAL  [MICRO-FIDUCIAL]  205.28,77.62 0 top
JP385  [1X06]  223.52,74.17 0 bottom
JP386  [1X06]  210.82,84.33 180 bottom
JP387  FIDUCIALUFIDUCIAL  [MICRO-FIDUCIAL]  210.19,80.77 0 top
JP388  FIDUCIALUFIDUCIAL  [MICRO-FIDUCIAL]  221.03,77.62 0 top
JP389  [1X06]  239.27,74.17 0 bottom
JP390  [1X06]  226.57,84.33 180 bottom
JP391  FIDUCIALUFIDUCIAL  [MICRO-FIDUCIAL]  225.93,80.77 0 top
JP392  FIDUCIALUFIDUCIAL  [MICRO-FIDUCIAL]  236.78,77.62 0 top
JP393  [1X06]  144.78,87.38 0 bottom
JP394  [1X06]  132.08,97.54 180 bottom
JP395  FIDUCIALUFIDUCIAL  [MICRO-FIDUCIAL]  131.44,93.98 0 top
JP396  FIDUCIALUFIDUCIAL  [MICRO-FIDUCIAL]  142.29,90.83 0 top
JP397  [1X06]  160.53,87.38 0 bottom
JP398  [1X06]  147.83,97.54 180 bottom
JP399  FIDUCIALUFIDUCIAL  [MICRO-FIDUCIAL]  147.19,93.98 0 top
JP400  FIDUCIALUFIDUCIAL  [MICRO-FIDUCIAL]  158.04,90.83 0 top
JP401  [1X06]  176.28,87.38 0 bottom
JP402  [1X06]  163.58,97.54 180 bottom
JP403  FIDUCIALUFIDUCIAL  [MICRO-FIDUCIAL]  162.94,93.98 0 top
JP404  FIDUCIALUFIDUCIAL  [MICRO-FIDUCIAL]  173.79,90.83 0 top
JP405  [1X06]  192.02,87.38 0 bottom
JP406  [1X06]  179.32,97.54 180 bottom
JP407  FIDUCIALUFIDUCIAL  [MICRO-FIDUCIAL]  178.69,93.98 0 top
JP408  FIDUCIALUFIDUCIAL  [MICRO-FIDUCIAL]  189.53,90.83 0 top
JP409  [1X06]  207.77,87.38 0 bottom
JP410  [1X06]  195.07,97.54 180 bottom
JP411  FIDUCIALUFIDUCIAL  [MICRO-FIDUCIAL]  194.44,93.98 0 top
JP412  FIDUCIALUFIDUCIAL  [MICRO-FIDUCIAL]  205.28,90.83 0 top
JP413  [1X06]  223.52,87.38 0 bottom
JP414  [1X06]  210.82,97.54 180 bottom
JP415  FIDUCIALUFIDUCIAL  [MICRO-FIDUCIAL]  210.19,93.98 0 top
JP416  FIDUCIALUFIDUCIAL  [MICRO-FIDUCIAL]  221.03,90.83 0 top
JP417  [1X06]  239.27,87.38 0 bottom
JP418  [1X06]  226.57,97.54 180 bottom
JP419  FIDUCIALUFIDUCIAL  [MICRO-FIDUCIAL]  225.93,93.98 0 top
JP420  FIDUCIALUFIDUCIAL  [MICRO-FIDUCIAL]  236.78,90.83 0 top
JP421  [1X06]  144.78,100.58 0 bottom
JP422  [1X06]  132.08,110.74 180 bottom
JP423  FIDUCIALUFIDUCIAL  [MICRO-FIDUCIAL]  131.44,107.19 0 top
JP424  FIDUCIALUFIDUCIAL  [MICRO-FIDUCIAL]  142.29,104.04 0 top
JP425  [1X06]  160.53,100.58 0 bottom
JP426  [1X06]  147.83,110.74 180 bottom
JP427  FIDUCIALUFIDUCIAL  [MICRO-FIDUCIAL]  147.19,107.19 0 top
JP428  FIDUCIALUFIDUCIAL  [MICRO-FIDUCIAL]  158.04,104.04 0 top
JP429  [1X06]  176.28,100.58 0 bottom
JP430  [1X06]  163.58,110.74 180 bottom
JP431  FIDUCIALUFIDUCIAL  [MICRO-FIDUCIAL]  162.94,107.19 0 top
JP432  FIDUCIALUFIDUCIAL  [MICRO-FIDUCIAL]  173.79,104.04 0 top
JP433  [1X06]  192.02,100.58 0 bottom
JP434  [1X06]  179.32,110.74 180 bottom
JP435  FIDUCIALUFIDUCIAL  [MICRO-FIDUCIAL]  178.69,107.19 0 top
JP436  FIDUCIALUFIDUCIAL  [MICRO-FIDUCIAL]  189.53,104.04 0 top
JP437  [1X06]  207.77,100.58 0 bottom
JP438  [1X06]  195.07,110.74 180 bottom
JP439  FIDUCIALUFIDUCIAL  [MICRO-FIDUCIAL]  194.44,107.19 0 top
JP440  FIDUCIALUFIDUCIAL  [MICRO-FIDUCIAL]  205.28,104.04 0 top
JP441  [1X06]  223.52,100.58 0 bottom
JP442  [1X06]  210.82,110.74 180 bottom
JP443  FIDUCIALUFIDUCIAL  [MICRO-FIDUCIAL]  210.19,107.19 0 top
JP444  FIDUCIALUFIDUCIAL  [MICRO-FIDUCIAL]  221.03,104.04 0 top
JP445  [1X06]  239.27,100.58 0 bottom
JP446  [1X06]  226.57,110.74 180 bottom
JP447  FIDUCIALUFIDUCIAL  [MICRO-FIDUCIAL]  225.93,107.19 0 top
JP448  FIDUCIALUFIDUCIAL  [MICRO-FIDUCIAL]  236.78,104.04 0 top
JP449  [1X06]  20.83,127.51 0 bottom
JP450  [1X06]  8.13,137.67 180 bottom
JP451  FIDUCIALUFIDUCIAL  [MICRO-FIDUCIAL]  7.49,134.11 0 top
JP452  FIDUCIALUFIDUCIAL  [MICRO-FIDUCIAL]  18.34,130.96 0 top
JP453  [1X06]  36.58,127.51 0 bottom
JP454  [1X06]  23.88,137.67 180 bottom
JP455  FIDUCIALUFIDUCIAL  [MICRO-FIDUCIAL]  23.24,134.11 0 top
JP456  FIDUCIALUFIDUCIAL  [MICRO-FIDUCIAL]  34.09,130.96 0 top
JP457  [1X06]  52.32,127.51 0 bottom
JP458  [1X06]  39.62,137.67 180 bottom
JP459  FIDUCIALUFIDUCIAL  [MICRO-FIDUCIAL]  38.99,134.11 0 top
JP460  FIDUCIALUFIDUCIAL  [MICRO-FIDUCIAL]  49.83,130.96 0 top
JP461  [1X06]  68.07,127.51 0 bottom
JP462  [1X06]  55.37,137.67 180 bottom
JP463  FIDUCIALUFIDUCIAL  [MICRO-FIDUCIAL]  54.74,134.11 0 top
JP464  FIDUCIALUFIDUCIAL  [MICRO-FIDUCIAL]  65.58,130.96 0 top
JP465  [1X06]  83.82,127.51 0 bottom
JP466  [1X06]  71.12,137.67 180 bottom
JP467  FIDUCIALUFIDUCIAL  [MICRO-FIDUCIAL]  70.48,134.11 0 top
JP468  FIDUCIALUFIDUCIAL  [MICRO-FIDUCIAL]  81.33,130.96 0 top
JP469  [1X06]  99.57,127.51 0 bottom
JP470  [1X06]  86.87,137.67 180 bottom
JP471  FIDUCIALUFIDUCIAL  [MICRO-FIDUCIAL]  86.23,134.11 0 top
JP472  FIDUCIALUFIDUCIAL  [MICRO-FIDUCIAL]  97.08,130.96 0 top
JP473  [1X06]  115.32,127.51 0 bottom
JP474  [1X06]  102.62,137.67 180 bottom
JP475  FIDUCIALUFIDUCIAL  [MICRO-FIDUCIAL]  101.98,134.11 0 top
JP476  FIDUCIALUFIDUCIAL  [MICRO-FIDUCIAL]  112.83,130.96 0 top
JP477  [1X06]  20.83,140.72 0 bottom
JP478  [1X06]  8.13,150.88 180 bottom
JP479  FIDUCIALUFIDUCIAL  [MICRO-FIDUCIAL]  7.49,147.32 0 top
JP480  FIDUCIALUFIDUCIAL  [MICRO-FIDUCIAL]  18.34,144.17 0 top
JP481  [1X06]  36.58,140.72 0 bottom
JP482  [1X06]  23.88,150.88 180 bottom
JP483  FIDUCIALUFIDUCIAL  [MICRO-FIDUCIAL]  23.24,147.32 0 top
JP484  FIDUCIALUFIDUCIAL  [MICRO-FIDUCIAL]  34.09,144.17 0 top
JP485  [1X06]  52.32,140.72 0 bottom
JP486  [1X06]  39.62,150.88 180 bottom
JP487  FIDUCIALUFIDUCIAL  [MICRO-FIDUCIAL]  38.99,147.32 0 top
JP488  FIDUCIALUFIDUCIAL  [MICRO-FIDUCIAL]  49.83,144.17 0 top
JP489  [1X06]  68.07,140.72 0 bottom
JP490  [1X06]  55.37,150.88 180 bottom
JP491  FIDUCIALUFIDUCIAL  [MICRO-FIDUCIAL]  54.74,147.32 0 top
JP492  FIDUCIALUFIDUCIAL  [MICRO-FIDUCIAL]  65.58,144.17 0 top
JP493  [1X06]  83.82,140.72 0 bottom
JP494  [1X06]  71.12,150.88 180 bottom
JP495  FIDUCIALUFIDUCIAL  [MICRO-FIDUCIAL]  70.48,147.32 0 top
JP496  FIDUCIALUFIDUCIAL  [MICRO-FIDUCIAL]  81.33,144.17 0 top
JP497  [1X06]  99.57,140.72 0 bottom
JP498  [1X06]  86.87,150.88 180 bottom
JP499  FIDUCIALUFIDUCIAL  [MICRO-FIDUCIAL]  86.23,147.32 0 top
JP500  FIDUCIALUFIDUCIAL  [MICRO-FIDUCIAL]  97.08,144.17 0 top
JP501  [1X06]  115.32,140.72 0 bottom
JP502  [1X06]  102.62,150.88 180 bottom
JP503  FIDUCIALUFIDUCIAL  [MICRO-FIDUCIAL]  101.98,147.32 0 top
JP504  FIDUCIALUFIDUCIAL  [MICRO-FIDUCIAL]  112.83,144.17 0 top
JP505  [1X06]  20.83,153.92 0 bottom
JP506  [1X06]  8.13,164.08 180 bottom
JP507  FIDUCIALUFIDUCIAL  [MICRO-FIDUCIAL]  7.49,160.53 0 top
JP508  FIDUCIALUFIDUCIAL  [MICRO-FIDUCIAL]  18.34,157.38 0 top
JP509  [1X06]  36.58,153.92 0 bottom
JP510  [1X06]  23.88,164.08 180 bottom
JP511  FIDUCIALUFIDUCIAL  [MICRO-FIDUCIAL]  23.24,160.53 0 top
JP512  FIDUCIALUFIDUCIAL  [MICRO-FIDUCIAL]  34.09,157.38 0 top
JP513  [1X06]  52.32,153.92 0 bottom
JP514  [1X06]  39.62,164.08 180 bottom
JP515  FIDUCIALUFIDUCIAL  [MICRO-FIDUCIAL]  38.99,160.53 0 top
JP516  FIDUCIALUFIDUCIAL  [MICRO-FIDUCIAL]  49.83,157.38 0 top
JP517  [1X06]  68.07,153.92 0 bottom
JP518  [1X06]  55.37,164.08 180 bottom
JP519  FIDUCIALUFIDUCIAL  [MICRO-FIDUCIAL]  54.74,160.53 0 top
JP520  FIDUCIALUFIDUCIAL  [MICRO-FIDUCIAL]  65.58,157.38 0 top
JP521  [1X06]  83.82,153.92 0 bottom
JP522  [1X06]  71.12,164.08 180 bottom
JP523  FIDUCIALUFIDUCIAL  [MICRO-FIDUCIAL]  70.48,160.53 0 top
JP524  FIDUCIALUFIDUCIAL  [MICRO-FIDUCIAL]  81.33,157.38 0 top
JP525  [1X06]  99.57,153.92 0 bottom
JP526  [1X06]  86.87,164.08 180 bottom
JP527  FIDUCIALUFIDUCIAL  [MICRO-FIDUCIAL]  86.23,160.53 0 top
JP528  FIDUCIALUFIDUCIAL  [MICRO-FIDUCIAL]  97.08,157.38 0 top
JP529  [1X06]  115.32,153.92 0 bottom
JP530  [1X06]  102.62,164.08 180 bottom
JP531  FIDUCIALUFIDUCIAL  [MICRO-FIDUCIAL]  101.98,160.53 0 top
JP532  FIDUCIALUFIDUCIAL  [MICRO-FIDUCIAL]  112.83,157.38 0 top
JP533  [1X06]  20.83,167.13 0 bottom
JP534  [1X06]  8.13,177.29 180 bottom
JP535  FIDUCIALUFIDUCIAL  [MICRO-FIDUCIAL]  7.49,173.74 0 top
JP536  FIDUCIALUFIDUCIAL  [MICRO-FIDUCIAL]  18.34,170.59 0 top
JP537  [1X06]  36.58,167.13 0 bottom
JP538  [1X06]  23.88,177.29 180 bottom
JP539  FIDUCIALUFIDUCIAL  [MICRO-FIDUCIAL]  23.24,173.74 0 top
JP540  FIDUCIALUFIDUCIAL  [MICRO-FIDUCIAL]  34.09,170.59 0 top
JP541  [1X06]  52.32,167.13 0 bottom
JP542  [1X06]  39.62,177.29 180 bottom
JP543  FIDUCIALUFIDUCIAL  [MICRO-FIDUCIAL]  38.99,173.74 0 top
JP544  FIDUCIALUFIDUCIAL  [MICRO-FIDUCIAL]  49.83,170.59 0 top
JP545  [1X06]  68.07,167.13 0 bottom
JP546  [1X06]  55.37,177.29 180 bottom
JP547  FIDUCIALUFIDUCIAL  [MICRO-FIDUCIAL]  54.74,173.74 0 top
JP548  FIDUCIALUFIDUCIAL  [MICRO-FIDUCIAL]  65.58,170.59 0 top
JP549  [1X06]  83.82,167.13 0 bottom
JP550  [1X06]  71.12,177.29 180 bottom
JP551  FIDUCIALUFIDUCIAL  [MICRO-FIDUCIAL]  70.48,173.74 0 top
JP552  FIDUCIALUFIDUCIAL  [MICRO-FIDUCIAL]  81.33,170.59 0 top
JP553  [1X06]  99.57,167.13 0 bottom
JP554  [1X06]  86.87,177.29 180 bottom
JP555  FIDUCIALUFIDUCIAL  [MICRO-FIDUCIAL]  86.23,173.74 0 top
JP556  FIDUCIALUFIDUCIAL  [MICRO-FIDUCIAL]  97.08,170.59 0 top
JP557  [1X06]  115.32,167.13 0 bottom
JP558  [1X06]  102.62,177.29 180 bottom
JP559  FIDUCIALUFIDUCIAL  [MICRO-FIDUCIAL]  101.98,173.74 0 top
JP560  FIDUCIALUFIDUCIAL  [MICRO-FIDUCIAL]  112.83,170.59 0 top
JP561  [1X06]  20.83,180.34 0 bottom
JP562  [1X06]  8.13,190.5 180 bottom
JP563  FIDUCIALUFIDUCIAL  [MICRO-FIDUCIAL]  7.49,186.94 0 top
JP564  FIDUCIALUFIDUCIAL  [MICRO-FIDUCIAL]  18.34,183.79 0 top
JP565  [1X06]  36.58,180.34 0 bottom
JP566  [1X06]  23.88,190.5 180 bottom
JP567  FIDUCIALUFIDUCIAL  [MICRO-FIDUCIAL]  23.24,186.94 0 top
JP568  FIDUCIALUFIDUCIAL  [MICRO-FIDUCIAL]  34.09,183.79 0 top
JP569  [1X06]  52.32,180.34 0 bottom
JP570  [1X06]  39.62,190.5 180 bottom
JP571  FIDUCIALUFIDUCIAL  [MICRO-FIDUCIAL]  38.99,186.94 0 top
JP572  FIDUCIALUFIDUCIAL  [MICRO-FIDUCIAL]  49.83,183.79 0 top
JP573  [1X06]  68.07,180.34 0 bottom
JP574  [1X06]  55.37,190.5 180 bottom
JP575  FIDUCIALUFIDUCIAL  [MICRO-FIDUCIAL]  54.74,186.94 0 top
JP576  FIDUCIALUFIDUCIAL  [MICRO-FIDUCIAL]  65.58,183.79 0 top
JP577  [1X06]  83.82,180.34 0 bottom
JP578  [1X06]  71.12,190.5 180 bottom
JP579  FIDUCIALUFIDUCIAL  [MICRO-FIDUCIAL]  70.48,186.94 0 top
JP580  FIDUCIALUFIDUCIAL  [MICRO-FIDUCIAL]  81.33,183.79 0 top
JP581  [1X06]  99.57,180.34 0 bottom
JP582  [1X06]  86.87,190.5 180 bottom
JP583  FIDUCIALUFIDUCIAL  [MICRO-FIDUCIAL]  86.23,186.94 0 top
JP584  FIDUCIALUFIDUCIAL  [MICRO-FIDUCIAL]  97.08,183.79 0 top
JP585  [1X06]  115.32,180.34 0 bottom
JP586  [1X06]  102.62,190.5 180 bottom
JP587  FIDUCIALUFIDUCIAL  [MICRO-FIDUCIAL]  101.98,186.94 0 top
JP588  FIDUCIALUFIDUCIAL  [MICRO-FIDUCIAL]  112.83,183.79 0 top
JP589  [1X06]  20.83,193.55 0 bottom
JP590  [1X06]  8.13,203.71 180 bottom
JP591  FIDUCIALUFIDUCIAL  [MICRO-FIDUCIAL]  7.49,200.15 0 top
JP592  FIDUCIALUFIDUCIAL  [MICRO-FIDUCIAL]  18.34,197 0 top
JP593  [1X06]  36.58,193.55 0 bottom
JP594  [1X06]  23.88,203.71 180 bottom
JP595  FIDUCIALUFIDUCIAL  [MICRO-FIDUCIAL]  23.24,200.15 0 top
JP596  FIDUCIALUFIDUCIAL  [MICRO-FIDUCIAL]  34.09,197 0 top
JP597  [1X06]  52.32,193.55 0 bottom
JP598  [1X06]  39.62,203.71 180 bottom
JP599  FIDUCIALUFIDUCIAL  [MICRO-FIDUCIAL]  38.99,200.15 0 top
JP600  FIDUCIALUFIDUCIAL  [MICRO-FIDUCIAL]  49.83,197 0 top
JP601  [1X06]  68.07,193.55 0 bottom
JP602  [1X06]  55.37,203.71 180 bottom
JP603  FIDUCIALUFIDUCIAL  [MICRO-FIDUCIAL]  54.74,200.15 0 top
JP604  FIDUCIALUFIDUCIAL  [MICRO-FIDUCIAL]  65.58,197 0 top
JP605  [1X06]  83.82,193.55 0 bottom
JP606  [1X06]  71.12,203.71 180 bottom
JP607  FIDUCIALUFIDUCIAL  [MICRO-FIDUCIAL]  70.48,200.15 0 top
JP608  FIDUCIALUFIDUCIAL  [MICRO-FIDUCIAL]  81.33,197 0 top
JP609  [1X06]  99.57,193.55 0 bottom
JP610  [1X06]  86.87,203.71 180 bottom
JP611  FIDUCIALUFIDUCIAL  [MICRO-FIDUCIAL]  86.23,200.15 0 top
JP612  FIDUCIALUFIDUCIAL  [MICRO-FIDUCIAL]  97.08,197 0 top
JP613  [1X06]  115.32,193.55 0 bottom
JP614  [1X06]  102.62,203.71 180 bottom
JP615  FIDUCIALUFIDUCIAL  [MICRO-FIDUCIAL]  101.98,200.15 0 top
JP616  FIDUCIALUFIDUCIAL  [MICRO-FIDUCIAL]  112.83,197 0 top
JP617  [1X06]  20.83,206.76 0 bottom
JP618  [1X06]  8.13,216.92 180 bottom
JP619  FIDUCIALUFIDUCIAL  [MICRO-FIDUCIAL]  7.49,213.36 0 top
JP620  FIDUCIALUFIDUCIAL  [MICRO-FIDUCIAL]  18.34,210.21 0 top
JP621  [1X06]  36.58,206.76 0 bottom
JP622  [1X06]  23.88,216.92 180 bottom
JP623  FIDUCIALUFIDUCIAL  [MICRO-FIDUCIAL]  23.24,213.36 0 top
JP624  FIDUCIALUFIDUCIAL  [MICRO-FIDUCIAL]  34.09,210.21 0 top
JP625  [1X06]  52.32,206.76 0 bottom
JP626  [1X06]  39.62,216.92 180 bottom
JP627  FIDUCIALUFIDUCIAL  [MICRO-FIDUCIAL]  38.99,213.36 0 top
JP628  FIDUCIALUFIDUCIAL  [MICRO-FIDUCIAL]  49.83,210.21 0 top
JP629  [1X06]  68.07,206.76 0 bottom
JP630  [1X06]  55.37,216.92 180 bottom
JP631  FIDUCIALUFIDUCIAL  [MICRO-FIDUCIAL]  54.74,213.36 0 top
JP632  FIDUCIALUFIDUCIAL  [MICRO-FIDUCIAL]  65.58,210.21 0 top
JP633  [1X06]  83.82,206.76 0 bottom
JP634  [1X06]  71.12,216.92 180 bottom
JP635  FIDUCIALUFIDUCIAL  [MICRO-FIDUCIAL]  70.48,213.36 0 top
JP636  FIDUCIALUFIDUCIAL  [MICRO-FIDUCIAL]  81.33,210.21 0 top
JP637  [1X06]  99.57,206.76 0 bottom
JP638  [1X06]  86.87,216.92 180 bottom
JP639  FIDUCIALUFIDUCIAL  [MICRO-FIDUCIAL]  86.23,213.36 0 top
JP640  FIDUCIALUFIDUCIAL  [MICRO-FIDUCIAL]  97.08,210.21 0 top
JP641  [1X06]  115.32,206.76 0 bottom
JP642  [1X06]  102.62,216.92 180 bottom
JP643  FIDUCIALUFIDUCIAL  [MICRO-FIDUCIAL]  101.98,213.36 0 top
JP644  FIDUCIALUFIDUCIAL  [MICRO-FIDUCIAL]  112.83,210.21 0 top
JP645  [1X06]  20.83,219.96 0 bottom
JP646  [1X06]  8.13,230.12 180 bottom
JP647  FIDUCIALUFIDUCIAL  [MICRO-FIDUCIAL]  7.49,226.57 0 top
JP648  FIDUCIALUFIDUCIAL  [MICRO-FIDUCIAL]  18.34,223.42 0 top
JP649  [1X06]  36.58,219.96 0 bottom
JP650  [1X06]  23.88,230.12 180 bottom
JP651  FIDUCIALUFIDUCIAL  [MICRO-FIDUCIAL]  23.24,226.57 0 top
JP652  FIDUCIALUFIDUCIAL  [MICRO-FIDUCIAL]  34.09,223.42 0 top
JP653  [1X06]  52.32,219.96 0 bottom
JP654  [1X06]  39.62,230.12 180 bottom
JP655  FIDUCIALUFIDUCIAL  [MICRO-FIDUCIAL]  38.99,226.57 0 top
JP656  FIDUCIALUFIDUCIAL  [MICRO-FIDUCIAL]  49.83,223.42 0 top
JP657  [1X06]  68.07,219.96 0 bottom
JP658  [1X06]  55.37,230.12 180 bottom
JP659  FIDUCIALUFIDUCIAL  [MICRO-FIDUCIAL]  54.74,226.57 0 top
JP660  FIDUCIALUFIDUCIAL  [MICRO-FIDUCIAL]  65.58,223.42 0 top
JP661  [1X06]  83.82,219.96 0 bottom
JP662  [1X06]  71.12,230.12 180 bottom
JP663  FIDUCIALUFIDUCIAL  [MICRO-FIDUCIAL]  70.48,226.57 0 top
JP664  FIDUCIALUFIDUCIAL  [MICRO-FIDUCIAL]  81.33,223.42 0 top
JP665  [1X06]  99.57,219.96 0 bottom
JP666  [1X06]  86.87,230.12 180 bottom
JP667  FIDUCIALUFIDUCIAL  [MICRO-FIDUCIAL]  86.23,226.57 0 top
JP668  FIDUCIALUFIDUCIAL  [MICRO-FIDUCIAL]  97.08,223.42 0 top
JP669  [1X06]  115.32,219.96 0 bottom
JP670  [1X06]  102.62,230.12 180 bottom
JP671  FIDUCIALUFIDUCIAL  [MICRO-FIDUCIAL]  101.98,226.57 0 top
JP672  FIDUCIALUFIDUCIAL  [MICRO-FIDUCIAL]  112.83,223.42 0 top
JP673  [1X06]  144.78,127.51 0 bottom
JP674  [1X06]  132.08,137.67 180 bottom
JP675  FIDUCIALUFIDUCIAL  [MICRO-FIDUCIAL]  131.44,134.11 0 top
JP676  FIDUCIALUFIDUCIAL  [MICRO-FIDUCIAL]  142.29,130.96 0 top
JP677  [1X06]  160.53,127.51 0 bottom
JP678  [1X06]  147.83,137.67 180 bottom
JP679  FIDUCIALUFIDUCIAL  [MICRO-FIDUCIAL]  147.19,134.11 0 top
JP680  FIDUCIALUFIDUCIAL  [MICRO-FIDUCIAL]  158.04,130.96 0 top
JP681  [1X06]  176.28,127.51 0 bottom
JP682  [1X06]  163.58,137.67 180 bottom
JP683  FIDUCIALUFIDUCIAL  [MICRO-FIDUCIAL]  162.94,134.11 0 top
JP684  FIDUCIALUFIDUCIAL  [MICRO-FIDUCIAL]  173.79,130.96 0 top
JP685  [1X06]  192.02,127.51 0 bottom
JP686  [1X06]  179.32,137.67 180 bottom
JP687  FIDUCIALUFIDUCIAL  [MICRO-FIDUCIAL]  178.69,134.11 0 top
JP688  FIDUCIALUFIDUCIAL  [MICRO-FIDUCIAL]  189.53,130.96 0 top
JP689  [1X06]  207.77,127.51 0 bottom
JP690  [1X06]  195.07,137.67 180 bottom
JP691  FIDUCIALUFIDUCIAL  [MICRO-FIDUCIAL]  194.44,134.11 0 top
JP692  FIDUCIALUFIDUCIAL  [MICRO-FIDUCIAL]  205.28,130.96 0 top
JP693  [1X06]  223.52,127.51 0 bottom
JP694  [1X06]  210.82,137.67 180 bottom
JP695  FIDUCIALUFIDUCIAL  [MICRO-FIDUCIAL]  210.19,134.11 0 top
JP696  FIDUCIALUFIDUCIAL  [MICRO-FIDUCIAL]  221.03,130.96 0 top
JP697  [1X06]  239.27,127.51 0 bottom
JP698  [1X06]  226.57,137.67 180 bottom
JP699  FIDUCIALUFIDUCIAL  [MICRO-FIDUCIAL]  225.93,134.11 0 top
JP700  FIDUCIALUFIDUCIAL  [MICRO-FIDUCIAL]  236.78,130.96 0 top
JP701  [1X06]  144.78,140.72 0 bottom
JP702  [1X06]  132.08,150.88 180 bottom
JP703  FIDUCIALUFIDUCIAL  [MICRO-FIDUCIAL]  131.44,147.32 0 top
JP704  FIDUCIALUFIDUCIAL  [MICRO-FIDUCIAL]  142.29,144.17 0 top
JP705  [1X06]  160.53,140.72 0 bottom
JP706  [1X06]  147.83,150.88 180 bottom
JP707  FIDUCIALUFIDUCIAL  [MICRO-FIDUCIAL]  147.19,147.32 0 top
JP708  FIDUCIALUFIDUCIAL  [MICRO-FIDUCIAL]  158.04,144.17 0 top
JP709  [1X06]  176.28,140.72 0 bottom
JP710  [1X06]  163.58,150.88 180 bottom
JP711  FIDUCIALUFIDUCIAL  [MICRO-FIDUCIAL]  162.94,147.32 0 top
JP712  FIDUCIALUFIDUCIAL  [MICRO-FIDUCIAL]  173.79,144.17 0 top
JP713  [1X06]  192.02,140.72 0 bottom
JP714  [1X06]  179.32,150.88 180 bottom
JP715  FIDUCIALUFIDUCIAL  [MICRO-FIDUCIAL]  178.69,147.32 0 top
JP716  FIDUCIALUFIDUCIAL  [MICRO-FIDUCIAL]  189.53,144.17 0 top
JP717  [1X06]  207.77,140.72 0 bottom
JP718  [1X06]  195.07,150.88 180 bottom
JP719  FIDUCIALUFIDUCIAL  [MICRO-FIDUCIAL]  194.44,147.32 0 top
JP720  FIDUCIALUFIDUCIAL  [MICRO-FIDUCIAL]  205.28,144.17 0 top
JP721  [1X06]  223.52,140.72 0 bottom
JP722  [1X06]  210.82,150.88 180 bottom
JP723  FIDUCIALUFIDUCIAL  [MICRO-FIDUCIAL]  210.19,147.32 0 top
JP724  FIDUCIALUFIDUCIAL  [MICRO-FIDUCIAL]  221.03,144.17 0 top
JP725  [1X06]  239.27,140.72 0 bottom
JP726  [1X06]  226.57,150.88 180 bottom
JP727  FIDUCIALUFIDUCIAL  [MICRO-FIDUCIAL]  225.93,147.32 0 top
JP728  FIDUCIALUFIDUCIAL  [MICRO-FIDUCIAL]  236.78,144.17 0 top
JP729  [1X06]  144.78,153.92 0 bottom
JP730  [1X06]  132.08,164.08 180 bottom
JP731  FIDUCIALUFIDUCIAL  [MICRO-FIDUCIAL]  131.44,160.53 0 top
JP732  FIDUCIALUFIDUCIAL  [MICRO-FIDUCIAL]  142.29,157.38 0 top
JP733  [1X06]  160.53,153.92 0 bottom
JP734  [1X06]  147.83,164.08 180 bottom
JP735  FIDUCIALUFIDUCIAL  [MICRO-FIDUCIAL]  147.19,160.53 0 top
JP736  FIDUCIALUFIDUCIAL  [MICRO-FIDUCIAL]  158.04,157.38 0 top
JP737  [1X06]  176.28,153.92 0 bottom
JP738  [1X06]  163.58,164.08 180 bottom
JP739  FIDUCIALUFIDUCIAL  [MICRO-FIDUCIAL]  162.94,160.53 0 top
JP740  FIDUCIALUFIDUCIAL  [MICRO-FIDUCIAL]  173.79,157.38 0 top
JP741  [1X06]  192.02,153.92 0 bottom
JP742  [1X06]  179.32,164.08 180 bottom
JP743  FIDUCIALUFIDUCIAL  [MICRO-FIDUCIAL]  178.69,160.53 0 top
JP744  FIDUCIALUFIDUCIAL  [MICRO-FIDUCIAL]  189.53,157.38 0 top
JP745  [1X06]  207.77,153.92 0 bottom
JP746  [1X06]  195.07,164.08 180 bottom
JP747  FIDUCIALUFIDUCIAL  [MICRO-FIDUCIAL]  194.44,160.53 0 top
JP748  FIDUCIALUFIDUCIAL  [MICRO-FIDUCIAL]  205.28,157.38 0 top
JP749  [1X06]  223.52,153.92 0 bottom
JP750  [1X06]  210.82,164.08 180 bottom
JP751  FIDUCIALUFIDUCIAL  [MICRO-FIDUCIAL]  210.19,160.53 0 top
JP752  FIDUCIALUFIDUCIAL  [MICRO-FIDUCIAL]  221.03,157.38 0 top
JP753  [1X06]  239.27,153.92 0 bottom
JP754  [1X06]  226.57,164.08 180 bottom
JP755  FIDUCIALUFIDUCIAL  [MICRO-FIDUCIAL]  225.93,160.53 0 top
JP756  FIDUCIALUFIDUCIAL  [MICRO-FIDUCIAL]  236.78,157.38 0 top
JP757  [1X06]  144.78,167.13 0 bottom
JP758  [1X06]  132.08,177.29 180 bottom
JP759  FIDUCIALUFIDUCIAL  [MICRO-FIDUCIAL]  131.44,173.74 0 top
JP760  FIDUCIALUFIDUCIAL  [MICRO-FIDUCIAL]  142.29,170.59 0 top
JP761  [1X06]  160.53,167.13 0 bottom
JP762  [1X06]  147.83,177.29 180 bottom
JP763  FIDUCIALUFIDUCIAL  [MICRO-FIDUCIAL]  147.19,173.74 0 top
JP764  FIDUCIALUFIDUCIAL  [MICRO-FIDUCIAL]  158.04,170.59 0 top
JP765  [1X06]  176.28,167.13 0 bottom
JP766  [1X06]  163.58,177.29 180 bottom
JP767  FIDUCIALUFIDUCIAL  [MICRO-FIDUCIAL]  162.94,173.74 0 top
JP768  FIDUCIALUFIDUCIAL  [MICRO-FIDUCIAL]  173.79,170.59 0 top
JP769  [1X06]  192.02,167.13 0 bottom
JP770  [1X06]  179.32,177.29 180 bottom
JP771  FIDUCIALUFIDUCIAL  [MICRO-FIDUCIAL]  178.69,173.74 0 top
JP772  FIDUCIALUFIDUCIAL  [MICRO-FIDUCIAL]  189.53,170.59 0 top
JP773  [1X06]  207.77,167.13 0 bottom
JP774  [1X06]  195.07,177.29 180 bottom
JP775  FIDUCIALUFIDUCIAL  [MICRO-FIDUCIAL]  194.44,173.74 0 top
JP776  FIDUCIALUFIDUCIAL  [MICRO-FIDUCIAL]  205.28,170.59 0 top
JP777  [1X06]  223.52,167.13 0 bottom
JP778  [1X06]  210.82,177.29 180 bottom
JP779  FIDUCIALUFIDUCIAL  [MICRO-FIDUCIAL]  210.19,173.74 0 top
JP780  FIDUCIALUFIDUCIAL  [MICRO-FIDUCIAL]  221.03,170.59 0 top
JP781  [1X06]  239.27,167.13 0 bottom
JP782  [1X06]  226.57,177.29 180 bottom
JP783  FIDUCIALUFIDUCIAL  [MICRO-FIDUCIAL]  225.93,173.74 0 top
JP784  FIDUCIALUFIDUCIAL  [MICRO-FIDUCIAL]  236.78,170.59 0 top
JP785  [1X06]  144.78,180.34 0 bottom
JP786  [1X06]  132.08,190.5 180 bottom
JP787  FIDUCIALUFIDUCIAL  [MICRO-FIDUCIAL]  131.44,186.94 0 top
JP788  FIDUCIALUFIDUCIAL  [MICRO-FIDUCIAL]  142.29,183.79 0 top
JP789  [1X06]  160.53,180.34 0 bottom
JP790  [1X06]  147.83,190.5 180 bottom
JP791  FIDUCIALUFIDUCIAL  [MICRO-FIDUCIAL]  147.19,186.94 0 top
JP792  FIDUCIALUFIDUCIAL  [MICRO-FIDUCIAL]  158.04,183.79 0 top
JP793  [1X06]  176.28,180.34 0 bottom
JP794  [1X06]  163.58,190.5 180 bottom
JP795  FIDUCIALUFIDUCIAL  [MICRO-FIDUCIAL]  162.94,186.94 0 top
JP796  FIDUCIALUFIDUCIAL  [MICRO-FIDUCIAL]  173.79,183.79 0 top
JP797  [1X06]  192.02,180.34 0 bottom
JP798  [1X06]  179.32,190.5 180 bottom
JP799  FIDUCIALUFIDUCIAL  [MICRO-FIDUCIAL]  178.69,186.94 0 top
JP800  FIDUCIALUFIDUCIAL  [MICRO-FIDUCIAL]  189.53,183.79 0 top
JP801  [1X06]  207.77,180.34 0 bottom
JP802  [1X06]  195.07,190.5 180 bottom
JP803  FIDUCIALUFIDUCIAL  [MICRO-FIDUCIAL]  194.44,186.94 0 top
JP804  FIDUCIALUFIDUCIAL  [MICRO-FIDUCIAL]  205.28,183.79 0 top
JP805  [1X06]  223.52,180.34 0 bottom
JP806  [1X06]  210.82,190.5 180 bottom
JP807  FIDUCIALUFIDUCIAL  [MICRO-FIDUCIAL]  210.19,186.94 0 top
JP808  FIDUCIALUFIDUCIAL  [MICRO-FIDUCIAL]  221.03,183.79 0 top
JP809  [1X06]  239.27,180.34 0 bottom
JP810  [1X06]  226.57,190.5 180 bottom
JP811  FIDUCIALUFIDUCIAL  [MICRO-FIDUCIAL]  225.93,186.94 0 top
JP812  FIDUCIALUFIDUCIAL  [MICRO-FIDUCIAL]  236.78,183.79 0 top
JP813  [1X06]  144.78,193.55 0 bottom
JP814  [1X06]  132.08,203.71 180 bottom
JP815  FIDUCIALUFIDUCIAL  [MICRO-FIDUCIAL]  131.44,200.15 0 top
JP816  FIDUCIALUFIDUCIAL  [MICRO-FIDUCIAL]  142.29,197 0 top
JP817  [1X06]  160.53,193.55 0 bottom
JP818  [1X06]  147.83,203.71 180 bottom
JP819  FIDUCIALUFIDUCIAL  [MICRO-FIDUCIAL]  147.19,200.15 0 top
JP820  FIDUCIALUFIDUCIAL  [MICRO-FIDUCIAL]  158.04,197 0 top
JP821  [1X06]  176.28,193.55 0 bottom
JP822  [1X06]  163.58,203.71 180 bottom
JP823  FIDUCIALUFIDUCIAL  [MICRO-FIDUCIAL]  162.94,200.15 0 top
JP824  FIDUCIALUFIDUCIAL  [MICRO-FIDUCIAL]  173.79,197 0 top
JP825  [1X06]  192.02,193.55 0 bottom
JP826  [1X06]  179.32,203.71 180 bottom
JP827  FIDUCIALUFIDUCIAL  [MICRO-FIDUCIAL]  178.69,200.15 0 top
JP828  FIDUCIALUFIDUCIAL  [MICRO-FIDUCIAL]  189.53,197 0 top
JP829  [1X06]  207.77,193.55 0 bottom
JP830  [1X06]  195.07,203.71 180 bottom
JP831  FIDUCIALUFIDUCIAL  [MICRO-FIDUCIAL]  194.44,200.15 0 top
JP832  FIDUCIALUFIDUCIAL  [MICRO-FIDUCIAL]  205.28,197 0 top
JP833  [1X06]  223.52,193.55 0 bottom
JP834  [1X06]  210.82,203.71 180 bottom
JP835  FIDUCIALUFIDUCIAL  [MICRO-FIDUCIAL]  210.19,200.15 0 top
JP836  FIDUCIALUFIDUCIAL  [MICRO-FIDUCIAL]  221.03,197 0 top
JP837  [1X06]  239.27,193.55 0 bottom
JP838  [1X06]  226.57,203.71 180 bottom
JP839  FIDUCIALUFIDUCIAL  [MICRO-FIDUCIAL]  225.93,200.15 0 top
JP840  FIDUCIALUFIDUCIAL  [MICRO-FIDUCIAL]  236.78,197 0 top
JP841  [1X06]  144.78,206.76 0 bottom
JP842  [1X06]  132.08,216.92 180 bottom
JP843  FIDUCIALUFIDUCIAL  [MICRO-FIDUCIAL]  131.44,213.36 0 top
JP844  FIDUCIALUFIDUCIAL  [MICRO-FIDUCIAL]  142.29,210.21 0 top
JP845  [1X06]  160.53,206.76 0 bottom
JP846  [1X06]  147.83,216.92 180 bottom
JP847  FIDUCIALUFIDUCIAL  [MICRO-FIDUCIAL]  147.19,213.36 0 top
JP848  FIDUCIALUFIDUCIAL  [MICRO-FIDUCIAL]  158.04,210.21 0 top
JP849  [1X06]  176.28,206.76 0 bottom
JP850  [1X06]  163.58,216.92 180 bottom
JP851  FIDUCIALUFIDUCIAL  [MICRO-FIDUCIAL]  162.94,213.36 0 top
JP852  FIDUCIALUFIDUCIAL  [MICRO-FIDUCIAL]  173.79,210.21 0 top
JP853  [1X06]  192.02,206.76 0 bottom
JP854  [1X06]  179.32,216.92 180 bottom
JP855  FIDUCIALUFIDUCIAL  [MICRO-FIDUCIAL]  178.69,213.36 0 top
JP856  FIDUCIALUFIDUCIAL  [MICRO-FIDUCIAL]  189.53,210.21 0 top
JP857  [1X06]  207.77,206.76 0 bottom
JP858  [1X06]  195.07,216.92 180 bottom
JP859  FIDUCIALUFIDUCIAL  [MICRO-FIDUCIAL]  194.44,213.36 0 top
JP860  FIDUCIALUFIDUCIAL  [MICRO-FIDUCIAL]  205.28,210.21 0 top
JP861  [1X06]  223.52,206.76 0 bottom
JP862  [1X06]  210.82,216.92 180 bottom
JP863  FIDUCIALUFIDUCIAL  [MICRO-FIDUCIAL]  210.19,213.36 0 top
JP864  FIDUCIALUFIDUCIAL  [MICRO-FIDUCIAL]  221.03,210.21 0 top
JP865  [1X06]  239.27,206.76 0 bottom
JP866  [1X06]  226.57,216.92 180 bottom
JP867  FIDUCIALUFIDUCIAL  [MICRO-FIDUCIAL]  225.93,213.36 0 top
JP868  FIDUCIALUFIDUCIAL  [MICRO-FIDUCIAL]  236.78,210.21 0 top
JP869  [1X06]  144.78,219.96 0 bottom
JP870  [1X06]  132.08,230.12 180 bottom
JP871  FIDUCIALUFIDUCIAL  [MICRO-FIDUCIAL]  131.44,226.57 0 top
JP872  FIDUCIALUFIDUCIAL  [MICRO-FIDUCIAL]  142.29,223.42 0 top
JP873  [1X06]  160.53,219.96 0 bottom
JP874  [1X06]  147.83,230.12 180 bottom
JP875  FIDUCIALUFIDUCIAL  [MICRO-FIDUCIAL]  147.19,226.57 0 top
JP876  FIDUCIALUFIDUCIAL  [MICRO-FIDUCIAL]  158.04,223.42 0 top
JP877  [1X06]  176.28,219.96 0 bottom
JP878  [1X06]  163.58,230.12 180 bottom
JP879  FIDUCIALUFIDUCIAL  [MICRO-FIDUCIAL]  162.94,226.57 0 top
JP880  FIDUCIALUFIDUCIAL  [MICRO-FIDUCIAL]  173.79,223.42 0 top
JP881  [1X06]  192.02,219.96 0 bottom
JP882  [1X06]  179.32,230.12 180 bottom
JP883  FIDUCIALUFIDUCIAL  [MICRO-FIDUCIAL]  178.69,226.57 0 top
JP884  FIDUCIALUFIDUCIAL  [MICRO-FIDUCIAL]  189.53,223.42 0 top
JP885  [1X06]  207.77,219.96 0 bottom
JP886  [1X06]  195.07,230.12 180 bottom
JP887  FIDUCIALUFIDUCIAL  [MICRO-FIDUCIAL]  194.44,226.57 0 top
JP888  FIDUCIALUFIDUCIAL  [MICRO-FIDUCIAL]  205.28,223.42 0 top
JP889  [1X06]  223.52,219.96 0 bottom
JP890  [1X06]  210.82,230.12 180 bottom
JP891  FIDUCIALUFIDUCIAL  [MICRO-FIDUCIAL]  210.19,226.57 0 top
JP892  FIDUCIALUFIDUCIAL  [MICRO-FIDUCIAL]  221.03,223.42 0 top
JP893  [1X06]  239.27,219.96 0 bottom
JP894  [1X06]  226.57,230.12 180 bottom
JP895  FIDUCIALUFIDUCIAL  [MICRO-FIDUCIAL]  225.93,226.57 0 top
JP896  FIDUCIALUFIDUCIAL  [MICRO-FIDUCIAL]  236.78,223.42 0 top
LOGO1  SFE_LOGO_FLAME.1_INCH  [SFE_LOGO_FLAME_.1]  17.14,10.41 0 bottom
LOGO2  OSHW-LOGOS  [OSHW-LOGO-S]  13.72,12.19 270 bottom
LOGO3  SFE_LOGO_FLAME.1_INCH  [SFE_LOGO_FLAME_.1]  32.89,10.41 0 bottom
LOGO4  OSHW-LOGOS  [OSHW-LOGO-S]  29.46,12.19 270 bottom
LOGO5  SFE_LOGO_FLAME.1_INCH  [SFE_LOGO_FLAME_.1]  48.64,10.41 0 bottom
LOGO6  OSHW-LOGOS  [OSHW-LOGO-S]  45.21,12.19 270 bottom
LOGO7  SFE_LOGO_FLAME.1_INCH  [SFE_LOGO_FLAME_.1]  64.39,10.41 0 bottom
LOGO8  OSHW-LOGOS  [OSHW-LOGO-S]  60.96,12.19 270 bottom
LOGO9  SFE_LOGO_FLAME.1_INCH  [SFE_LOGO_FLAME_.1]  80.14,10.41 0 bottom
LOGO10  OSHW-LOGOS  [OSHW-LOGO-S]  76.71,12.19 270 bottom
LOGO11  SFE_LOGO_FLAME.1_INCH  [SFE_LOGO_FLAME_.1]  95.89,10.41 0 bottom
LOGO12  OSHW-LOGOS  [OSHW-LOGO-S]  92.46,12.19 270 bottom
LOGO13  SFE_LOGO_FLAME.1_INCH  [SFE_LOGO_FLAME_.1]  111.63,10.41 0 bottom
LOGO14  OSHW-LOGOS  [OSHW-LOGO-S]  108.2,12.19 270 bottom
LOGO15  SFE_LOGO_FLAME.1_INCH  [SFE_LOGO_FLAME_.1]  17.14,23.62 0 bottom
LOGO16  OSHW-LOGOS  [OSHW-LOGO-S]  13.72,25.4 270 bottom
LOGO17  SFE_LOGO_FLAME.1_INCH  [SFE_LOGO_FLAME_.1]  32.89,23.62 0 bottom
LOGO18  OSHW-LOGOS  [OSHW-LOGO-S]  29.46,25.4 270 bottom
LOGO19  SFE_LOGO_FLAME.1_INCH  [SFE_LOGO_FLAME_.1]  48.64,23.62 0 bottom
LOGO20  OSHW-LOGOS  [OSHW-LOGO-S]  45.21,25.4 270 bottom
LOGO21  SFE_LOGO_FLAME.1_INCH  [SFE_LOGO_FLAME_.1]  64.39,23.62 0 bottom
LOGO22  OSHW-LOGOS  [OSHW-LOGO-S]  60.96,25.4 270 bottom
LOGO23  SFE_LOGO_FLAME.1_INCH  [SFE_LOGO_FLAME_.1]  80.14,23.62 0 bottom
LOGO24  OSHW-LOGOS  [OSHW-LOGO-S]  76.71,25.4 270 bottom
LOGO25  SFE_LOGO_FLAME.1_INCH  [SFE_LOGO_FLAME_.1]  95.89,23.62 0 bottom
LOGO26  OSHW-LOGOS  [OSHW-LOGO-S]  92.46,25.4 270 bottom
LOGO27  SFE_LOGO_FLAME.1_INCH  [SFE_LOGO_FLAME_.1]  111.63,23.62 0 bottom
LOGO28  OSHW-LOGOS  [OSHW-LOGO-S]  108.2,25.4 270 bottom
LOGO29  SFE_LOGO_FLAME.1_INCH  [SFE_LOGO_FLAME_.1]  17.14,36.83 0 bottom
LOGO30  OSHW-LOGOS  [OSHW-LOGO-S]  13.72,38.61 270 bottom
LOGO31  SFE_LOGO_FLAME.1_INCH  [SFE_LOGO_FLAME_.1]  32.89,36.83 0 bottom
LOGO32  OSHW-LOGOS  [OSHW-LOGO-S]  29.46,38.61 270 bottom
LOGO33  SFE_LOGO_FLAME.1_INCH  [SFE_LOGO_FLAME_.1]  48.64,36.83 0 bottom
LOGO34  OSHW-LOGOS  [OSHW-LOGO-S]  45.21,38.61 270 bottom
LOGO35  SFE_LOGO_FLAME.1_INCH  [SFE_LOGO_FLAME_.1]  64.39,36.83 0 bottom
LOGO36  OSHW-LOGOS  [OSHW-LOGO-S]  60.96,38.61 270 bottom
LOGO37  SFE_LOGO_FLAME.1_INCH  [SFE_LOGO_FLAME_.1]  80.14,36.83 0 bottom
LOGO38  OSHW-LOGOS  [OSHW-LOGO-S]  76.71,38.61 270 bottom
LOGO39  SFE_LOGO_FLAME.1_INCH  [SFE_LOGO_FLAME_.1]  95.89,36.83 0 bottom
LOGO40  OSHW-LOGOS  [OSHW-LOGO-S]  92.46,38.61 270 bottom
LOGO41  SFE_LOGO_FLAME.1_INCH  [SFE_LOGO_FLAME_.1]  111.63,36.83 0 bottom
LOGO42  OSHW-LOGOS  [OSHW-LOGO-S]  108.2,38.61 270 bottom
LOGO43  SFE_LOGO_FLAME.1_INCH  [SFE_LOGO_FLAME_.1]  17.14,50.04 0 bottom
LOGO44  OSHW-LOGOS  [OSHW-LOGO-S]  13.72,51.82 270 bottom
LOGO45  SFE_LOGO_FLAME.1_INCH  [SFE_LOGO_FLAME_.1]  32.89,50.04 0 bottom
LOGO46  OSHW-LOGOS  [OSHW-LOGO-S]  29.46,51.82 270 bottom
LOGO47  SFE_LOGO_FLAME.1_INCH  [SFE_LOGO_FLAME_.1]  48.64,50.04 0 bottom